# Allegro board XS6-2.brd
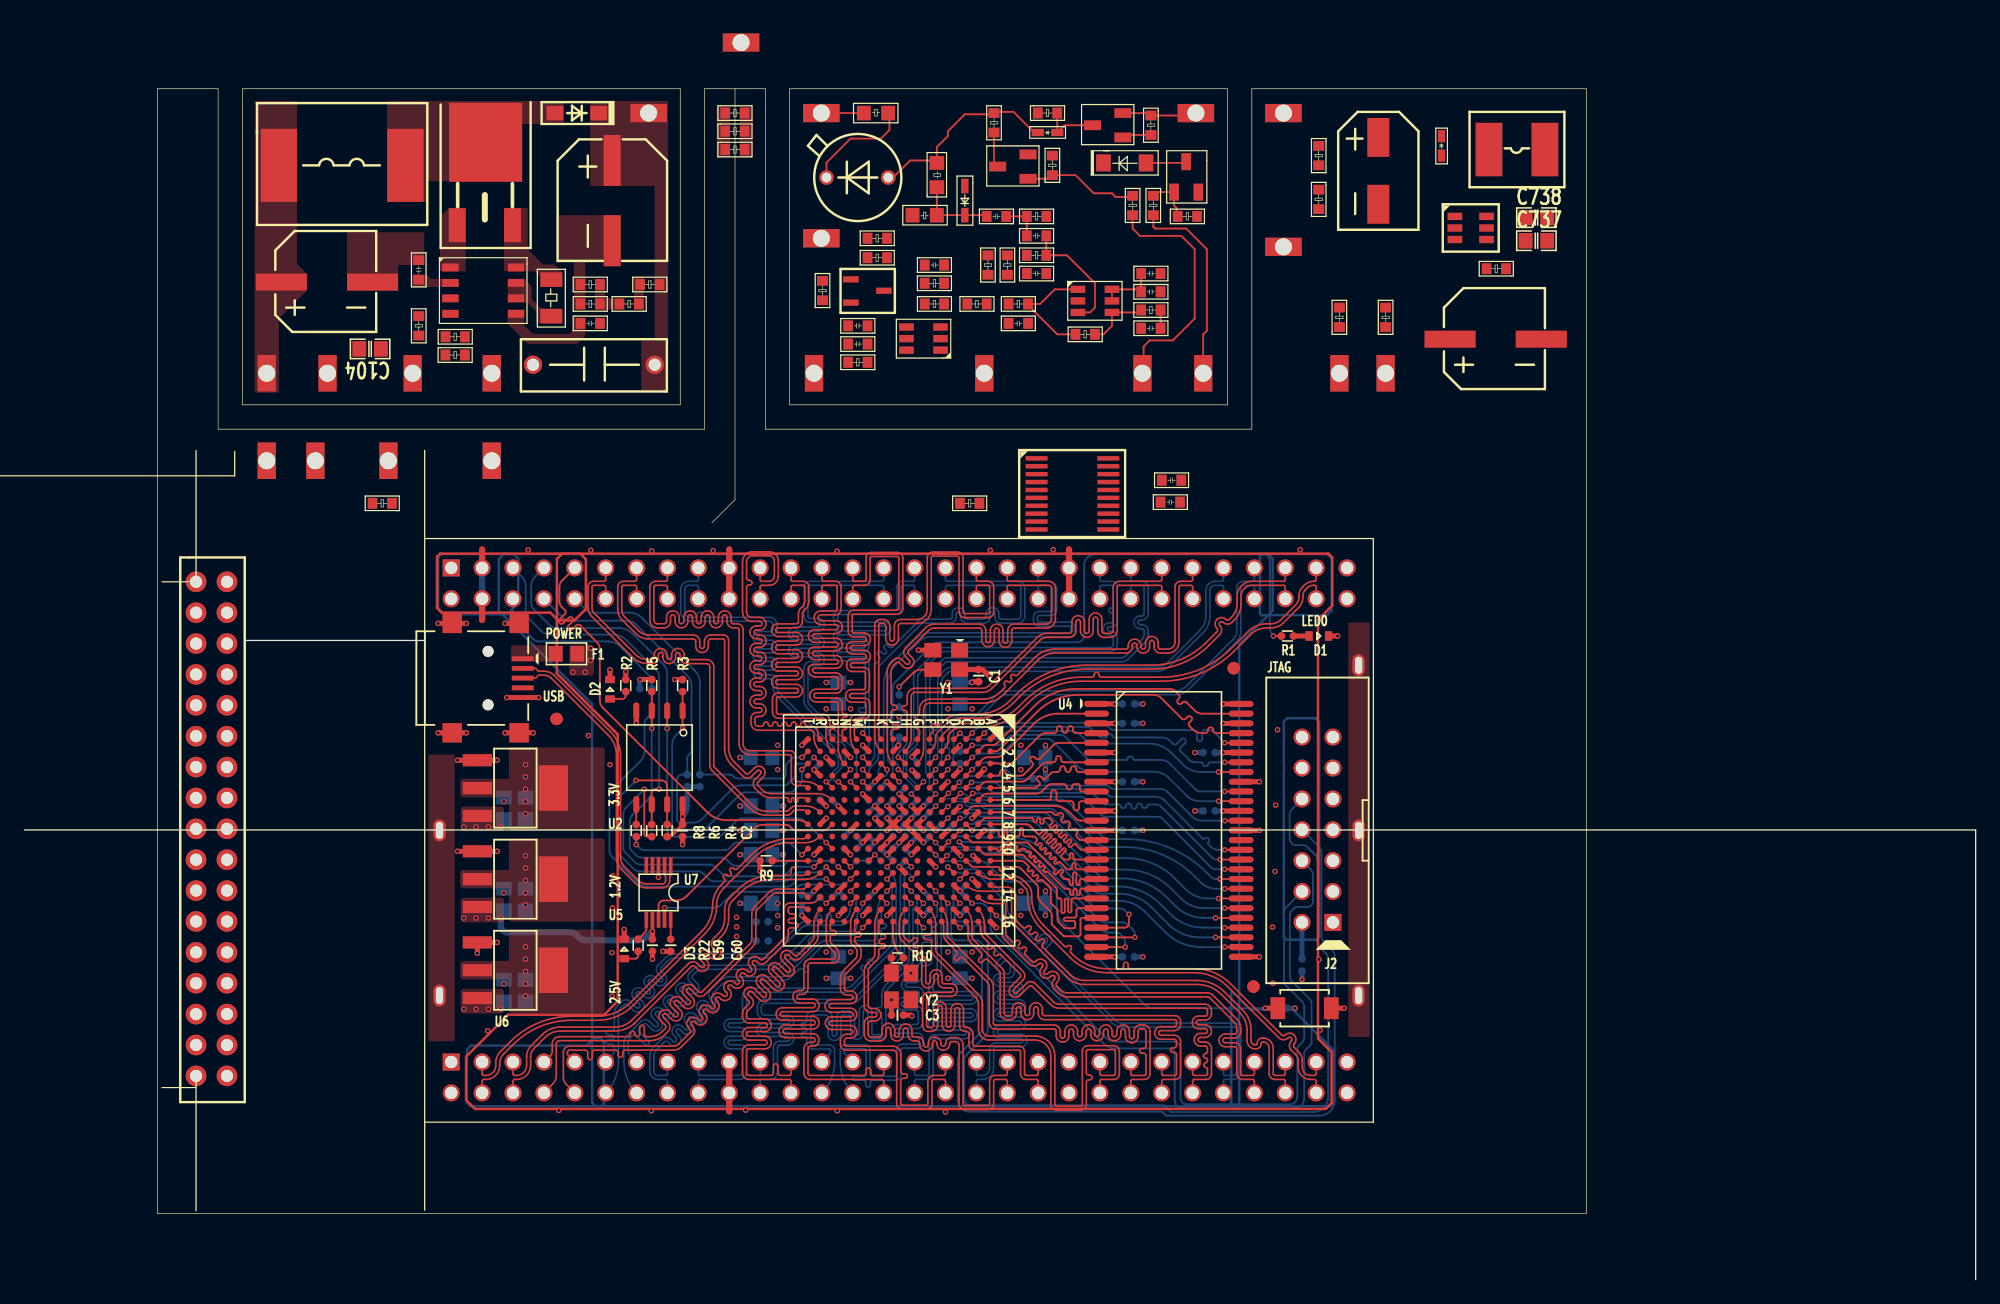
[diagram p0: board, top side]
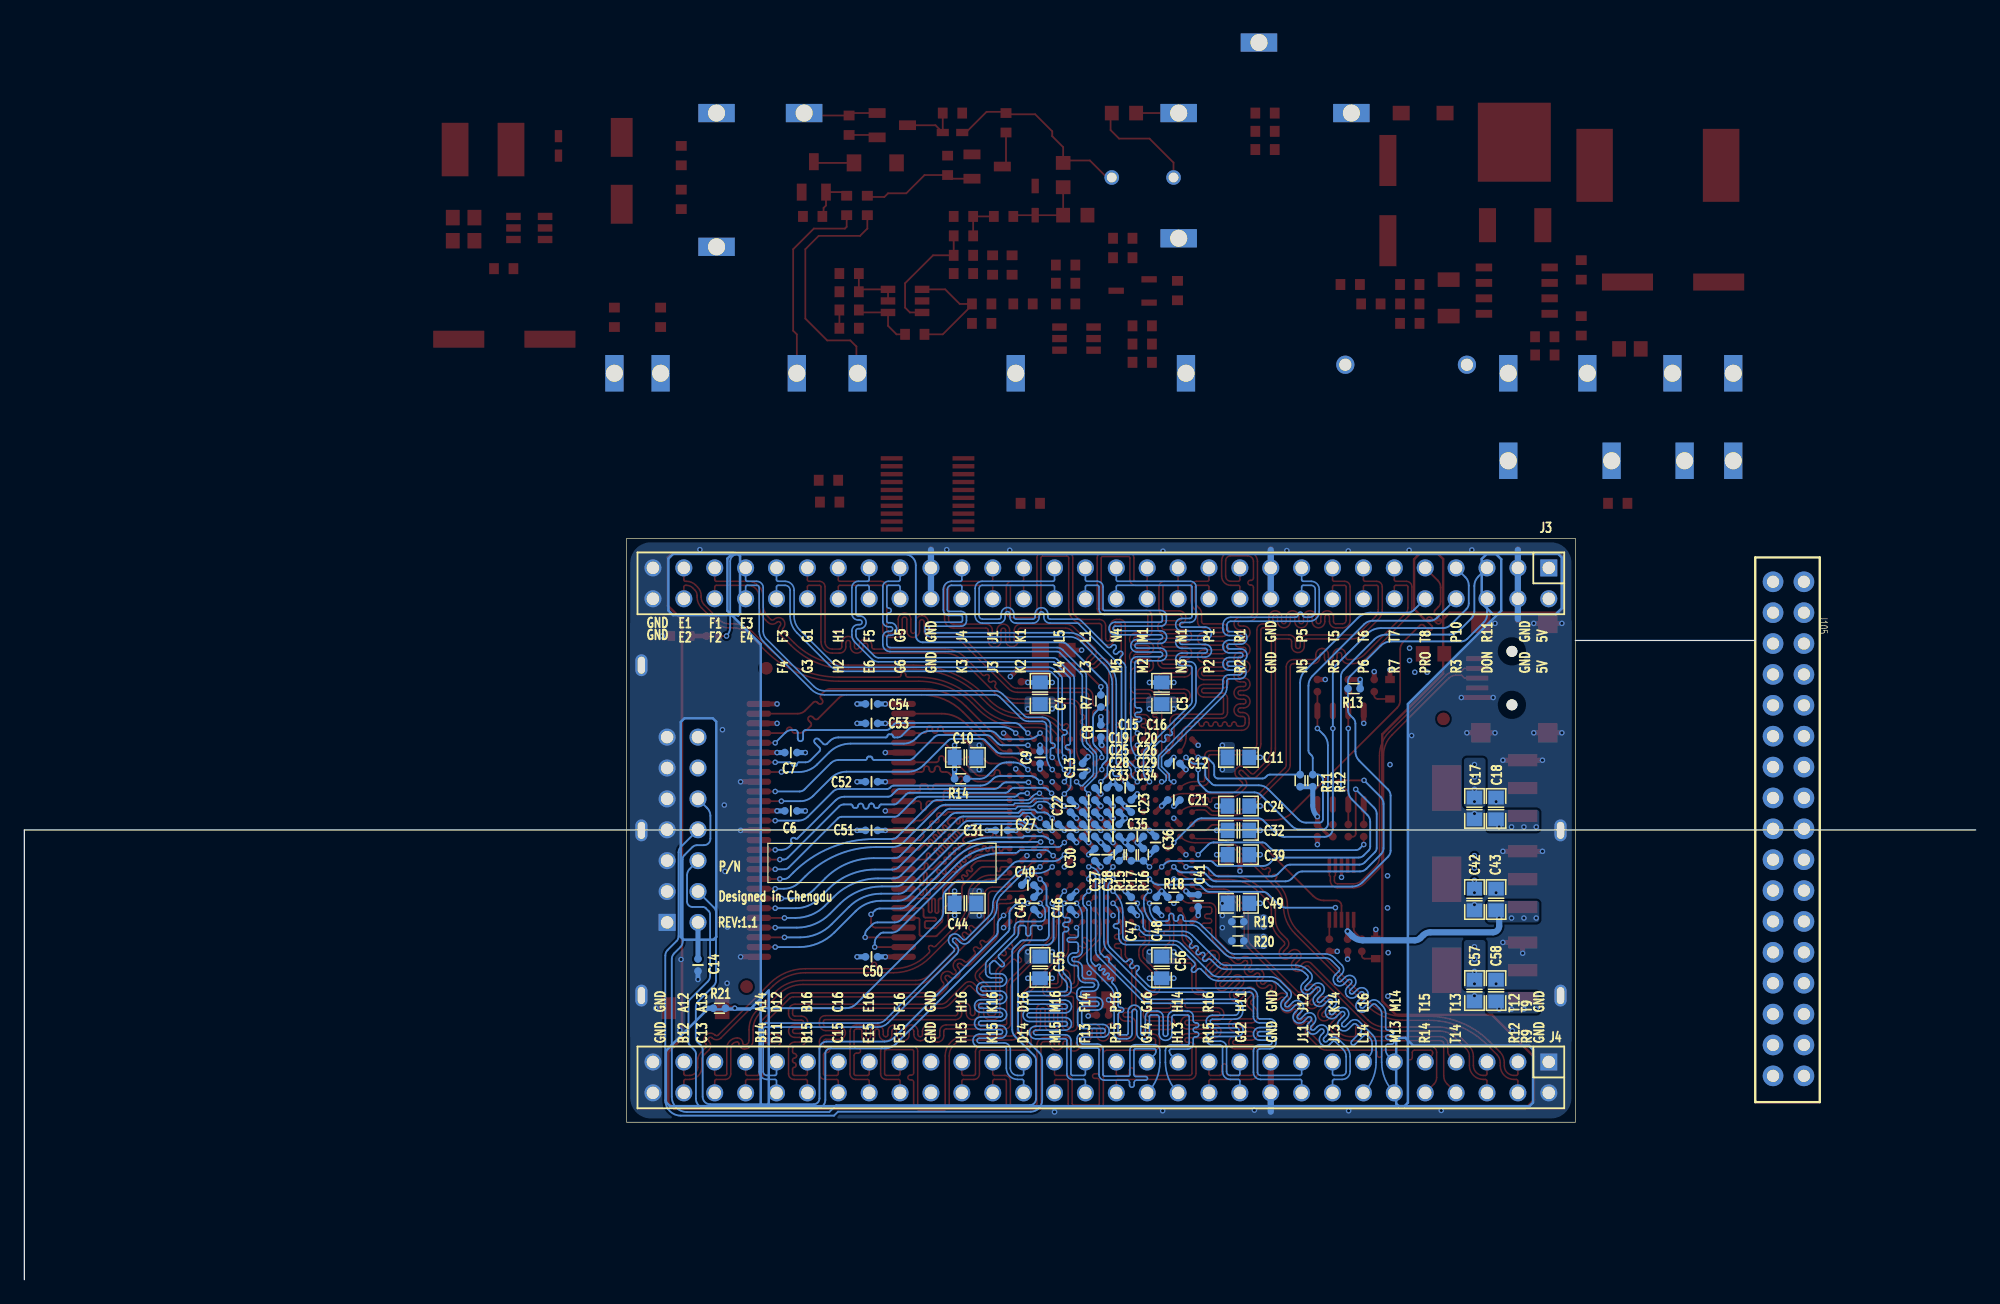
[diagram p1: board, bottom side, seen from below]

Outline 160.45 x 52.58 mm; copper layers: TOP, L2_GND, L3_P, BOTTOM. Coordinates in mm from the lower left corner of the outline.
Outline path: 0,36.99 160.45,36.99 160.45,0 ; 18.11,52.58 32.92,52.58

## Design rules (mm)
constraint set DEFAULT: min track width 0.147, pair gap 0.102
net group DP_USB: nets USB_DM USB_DP
net group NG_SDRAM_D8-15: nets SDRAM_DQ8 SDRAM_DQ9 SDRAM_DQ10 SDRAM_DQ11 SDRAM_DQ12 SDRAM_DQ13 SDRAM_DQ14 SDRAM_DQ15 SDRAM_UDQM

## Placement (name value [footprint] x y rotation side)
C1  100nF  [C0402]  78.47 49.68 270 top
C2  100nF  [C0402]  54.13 36.94 270 top
C3  100nF  [C0402]  71.8 21.76 0 top
C4  10uF  [C0805]  76.93 48.23 90 bottom
C5  10uF  [C0805]  66.93 48.23 90 bottom
C6  100nF  [C0402]  97.42 38.56 180 bottom
C7  100nF  [C0402]  97.42 43.36 180 bottom
C8  100nF  [C0402]  71.93 45.13 90 bottom
C9  100nF  [C0402]  76.93 42.96 270 bottom
C10  10uF  [C0805]  83.07 42.96 0 bottom
C11  10uF  [C0805]  60.62 42.96 180 bottom
C12  100nF  [C0402]  65.93 42.46 0 bottom
C13  100nF  [C0402]  73.43 41.96 90 bottom
C14  100nF  [C0402]  105.06 25.88 270 bottom
C15  100nF  [C0402]  71.93 40.46 180 bottom
C16  100nF  [C0402]  69.93 40.46 0 bottom
C17  22uF/6.3V  [C0805]  41.21 38.76 270 bottom
C18  10uF/10V  [C0805]  39.43 38.76 90 bottom
C19  100nF  [C0402]  72.93 39.46 180 bottom
C20  100nF  [C0402]  70.93 39.46 180 bottom
C21  100nF  [C0402]  65.93 39.46 180 bottom
C22  100nF  [C0402]  74.43 38.96 270 bottom
C23  100nF  [C0402]  69.43 38.96 270 bottom
C24  10uF  [C0805]  60.62 38.96 180 bottom
C25  100nF  [C0402]  72.93 38.46 180 bottom
C26  100nF  [C0402]  70.93 38.46 0 bottom
C27  100nF  [C0402]  75.93 37.46 0 bottom
C28  100nF  [C0402]  72.93 37.46 180 bottom
C29  100nF  [C0402]  70.93 37.46 0 bottom
C30  100nF  [C0402]  74.43 36.96 90 bottom
C31  100nF  [C0402]  80.11 36.96 0 bottom
C32  10uF  [C0805]  60.62 36.96 180 bottom
C33  100nF  [C0402]  72.93 36.46 180 bottom
C34  100nF  [C0402]  70.93 36.46 180 bottom
C35  100nF  [C0402]  68.93 36.46 0 bottom
C36  100nF  [C0402]  67.43 35.96 90 bottom
C37  100nF  [C0402]  72.43 34.96 270 bottom
C38  100nF  [C0402]  71.43 34.96 90 bottom
C39  10uF  [C0805]  60.62 34.96 180 bottom
C40  100nF  [C0402]  77.93 32.46 180 bottom
C41  100nF  [C0402]  63.93 31.17 270 bottom
C42  22uF/6.3V  [C0805]  41.21 31.27 270 bottom
C43  10uF/10V  [C0805]  39.43 31.27 90 bottom
C44  10uF  [C0805]  83.07 30.96 0 bottom
C45  100nF  [C0402]  77.43 30.96 90 bottom
C46  100nF  [C0402]  74.43 30.96 270 bottom
C47  100nF  [C0402]  69.43 30.96 270 bottom
C48  100nF  [C0402]  67.38 30.96 90 bottom
C49  10uF  [C0805]  60.62 30.96 180 bottom
C50  100nF  [C0402]  90.79 26.56 0 bottom
C51  100nF  [C0402]  90.79 36.96 0 bottom
C52  100nF  [C0402]  90.79 40.96 0 bottom
C53  100nF  [C0402]  90.79 45.76 0 bottom
C54  100nF  [C0402]  90.79 47.36 0 bottom
C55  10uF  [C0805]  76.93 25.68 270 bottom
C56  10uF  [C0805]  66.94 25.68 270 bottom
C57  22uF/6.3V  [C0805]  41.21 23.78 270 bottom
C58  10uF/10V  [C0805]  39.43 23.78 90 bottom
C59  100nF  [C0402]  51.65 27.5 270 top
C60  100nF  [C0402]  53.15 27.5 270 top
C102  0.1uF/35V  [C0603]  32.43 82.26 90 top
C103  220uF/35V  [CAP-SMD-D8D0-L8D3-W8D3-P7D5]  21.13 82.06 0 top
C104  10uF/35V  [C0805]  28.43 76.56 180 top
C205  0.1uF/35V  [C0603]  45.73 78.66 0 top
C401  4.7uF/400V  [CAP-SMD-D8D0-L10D3-B8D3]  48.33 92.06 270 top
C602  0.1uF/400V  [CAP-THR-L11D4-W3D8-P10D0-D0D8]  51.83 75.26 180 top
C639  0.1uF/16V  [C0603]  93.53 65.76 0 top
C640  0.1uF/16V  [C0603]  93.43 63.96 0 top
C715  100uF/35V  [CAP-SMD-L6D6-W6D6-P5D5-MM]  111.33 93.96 270 top
C737  10uF/35V  [C0805]  124.33 85.46 0 top
C738  10uF/35V  [C0805]  124.33 87.36 0 top
C739  220uF/35V  [CAP-SMD-D8D0-L8D3-W8D3-P7D5]  117.23 77.36 0 top
C930  0.1uF/16V  [C0603]  80.73 87.46 180 top
C934  10uF/16V  [C0603]  69.33 78.46 180 top
C935  0.1uF/16V  [C0603]  69.33 76.96 180 top
C936  0.1uF/16V  [C0603]  74.03 83.46 0 top
C941  10uF/16V  [C0603]  91.83 82.76 0 top
C942  0.1uF/16V  [C0603]  91.83 81.26 0 top
C943  0.1uF/16V  [C0603]  84.03 85.86 180 top
C944  0.1uF/16V  [C0603]  82.43 82.76 0 top
C945  0.1uF/16V  [C0603]  93.43 78.26 180 top
C946  0.1uF/16V  [C0603]  80.93 78.66 0 top
D1  GREEN  [Q0603]  106.44 52.94 0 top
D2  GREEN  [Q0603]  48.16 48.57 90 top
D3  GREEN  [Q0603]  49.33 27.2 90 top
D77  BAS521-7  [SOD-523-L1D2-W0D8-P1D6-MM]  116.53 94.06 270 top
D92  PTVSLC3D3V3B  [SOD323-L1D8-W1D3-P2D4-MM]  77.33 89.96 270 top
D94  SAPD  [SAPD-THR-2P]  68.53 90.66 180 top
D201  E1G  [SOD-123FL]  47.23 95.96 180 top
D611  MMSZ12T1G  [SOD-123-L2D8-W1D8-P3D5-MM]  88.73 91.86 0 top
D812  BAS521-7  [SOD-523-L1D2-W0D8-P1D6-MM]  83.33 94.36 0 top
F1  400mA  [F0805]  44.58 51.48 0 top
J1  MINI USB  [MINIUSB-AB-SM]  32.23 49.48 270 top
J2  CONN RCPT 7x2  [DIP2X7_2P54]  107.6 29.39 90 top
J3  CONN PLUG 30x2  [DIP2X30_2P54]  35.1 58.55 0 bottom
J4  CONN PLUG 30x2  [DIP2X30_2P54]  35.1 17.91 0 bottom
J105  Header-17x2  [DIP-17X2-2D54MM]  14.12 57.4 270 bottom
L74  47uH/1A  [IND-SMD-L5D0-W5D0-P4D6-MM]  125.03 92.96 180 top
L101  100uH/2A  [IND-SMD-L11D5-W10D0-P10D4]  20.93 91.66 0 top
NOREF  -  []  43.63 95.96 0 top
NOREF#2  -  [unnamed#2]  43.76 46.13 0 top
NOREF#3  -  []  108.76 17.91 90 top
NOREF#4  -  []  117.23 77.36 0 top
NOREF#5  -  []  35.59 86.74 0 top
NOREF#6  -  []  71.92 12.95 90 top
NOREF#7  -  []  17.93 97.96 0 top
NOREF#8  -  []  100.93 97.96 0 top
NOREF#9  -  []  43.33 78.36 90 top
NOREF#10  -  []  46.63 90.36 0 top
NOREF#11  -  []  21.13 82.06 0 top
NOREF#12  -  []  10.93 5.46 90 top
NOREF#13  -  []  10.93 67.96 90 top
NOREF#14  -  []  10.93 5.46 0 top
NOREF#15  -  []  122.33 73.26 90 top
NOREF#16  -  []  43.33 79.26 90 top
NOREF#17  -  []  26.23 77.96 90 top
NOREF#18  -  []  35.59 86.74 0 top
NOREF#19  -  []  20.63 80.21 0 top
NOREF#20  -  []  44.48 80.63 90 top
NOREF#21  -  []  51.73 87.56 90 top
NOREF#22  -  []  48.33 85.46 90 top
NOREF#23  -  [unnamed#2]  101.07 24.1 0 top
NOREF#24  -  [unnamed#2]  99.44 50.29 0 top
NOREF#25  -  []  116.73 75.51 0 top
NOREF#26  -  []  163.29 66.22 180 bottom
Q45  FH3400C  [SOT-23-3-L2D9-W1D3-P1D9-MM]  96.53 89.46 270 top
Q83  FH3400C  [SOT-23-3-L2D9-W1D3-P1D9-MM]  82.53 92.56 0 top
Q89  AO3401A  [SOT-23-3-L2D9-W1D3-P1D9-MM]  90.33 95.96 0 top
Q201  AOD458  [TO-252-2-DPAK]  37.93 93.56 90 top
R1  1K  [R0402]  103.86 52.94 180 top
R2  680R  [R0402]  49.46 48.87 270 top
R3  2.4K  [R0402]  54.13 48.87 90 top
R4  4.7K  [R0402]  52.86 36.94 270 top
R5  4.7K  [R0402]  51.59 48.87 90 top
R6  33R  [R0402]  51.59 36.94 90 top
R7  33R  [R0402]  71.93 47.6 90 bottom
R8  33R  [R0402]  50.32 36.94 90 top
R9  1K  [R0402]  61 34.46 180 top
R10  33R  [R0402]  71.8 26.47 180 top
R11  4.7K  [R0402]  55.55 41.05 270 bottom
R12  4.7K  [R0402]  54.51 41.05 270 bottom
R13  330R  [R0402]  51.11 48.62 180 bottom
R14  100R  [R0402]  83.46 41.2 0 bottom
R15  4.7K  [R0402]  70.43 34.96 90 bottom
R16  1K/NC  [R0402]  68.43 34.96 90 bottom
R17  1K  [R0402]  69.43 34.96 270 bottom
R18  4.7K  [R0402]  65.93 31.46 180 bottom
R19  0R/NC  [R0402]  60.67 29.44 180 bottom
R20  0R  [R0402]  60.67 27.86 180 bottom
R21  1K  [R0402]  103.3 22.33 180 bottom
R22  680R  [R0402]  50.47 27.5 270 top
R105  50mR  [R1206]  43.33 82.26 270 top
R172  0  [R0603]  57.63 95.96 0 top
R204  0  [R0603]  50.53 80.26 180 top
R206  DNP  [R0603]  32.43 77.66 90 top
R207  0  [R0603]  34.63 77.56 0 top
R209  DNP  [R0603]  34.63 76.06 0 top
R264  0  [R0603]  76.93 63.86 0 top
R302  DNP  [R0603]  47.33 81.86 180 top
R303  10K  [R0603]  47.33 80.26 180 top
R305  1.5M  [R0603]  52.23 81.86 180 top
R306  0  [R0603]  30.23 63.86 180 top
R326  1K  [R0603]  94.83 87.46 0 top
R528  100  [R0603]  92.83 87.56 90 top
R733  182K  [R0603]  106.43 93.26 270 top
R735  10K  [R0603]  106.43 89.66 270 top
R736  0  [R0603]  108.13 78.36 90 top
R740  10K  [R0603]  121.83 83.16 180 top
R741  0  [R0603]  111.93 78.36 90 top
R812  0  [R0603]  79.73 94.36 90 top
R818  1M  [R0603]  83.33 95.96 0 top
R822  1K  [R0603]  92.63 95.76 270 top
R842  100  [R0603]  91.13 87.56 90 top
R843  1K  [R0603]  84.53 90.86 90 top
R910  682  [R0603]  70.93 85.66 180 top
R911  332K  [R0805]  75.03 89.86 90 top
R916  10K  [R0603]  69.33 75.46 180 top
R941  100K  [R0805]  73.03 87.56 0 top
R956  100K  [R0603]  82.43 87.46 0 top
R957  4.99K  [R0603]  69.33 84.06 0 top
R960  499  [R0603]  65.63 80.56 90 top
R961  0  [R0603]  77.53 80.26 0 top
R962  10K  [R0603]  74.03 80.26 0 top
R963  1K  [R0603]  75.63 81.96 180 top
R965  4.99K  [R0603]  79.23 84.26 270 top
R966  4.99K  [R0603]  80.83 82.66 90 top
R967  100K  [R0603]  84.03 84.26 180 top
R968  4.99K  [R0603]  86.43 77.76 0 top
R969  100K  [R0603]  93.43 79.76 180 top
R970  100K  [R0603]  82.53 80.26 180 top
R971  0  [R0805]  71.03 95.96 180 top
R972  0  [R0603]  57.63 94.46 0 top
R973  0  [R0603]  57.63 92.96 0 top
S1  FSMRA2JH  [SMD_3X4X2MM]  105.27 22.33 0 top
T1  TPAD_015  [TP_OBL1_4X0_6]  109.71 50.54 90 top
T2  TPAD_015  [TP_OBL1_4X0_6]  34.14 36.96 90 top
T3  TPAD_015  [TP_OBL1_4X0_6]  109.71 36.96 90 top
T4  TPAD_015  [TP_OBL1_4X0_6]  34.14 23.37 90 top
T5  TPAD_015  [TP_OBL1_4X0_6]  109.71 23.37 90 top
TP1  T POINT F  [STAMP_HOLE_1D5X3D0_1D4]  58.93 101.76 90 bottom
TP2  T POINT F  [STAMP_HOLE_1D5X3D0_1D4]  51.33 95.96 270 top
TP3  T POINT F  [STAMP_HOLE_1D5X3D0_1D4]  19.93 74.56 180 top
TP4  T POINT F  [STAMP_HOLE_1D5X3D0_1D4]  24.93 74.56 180 top
TP5  T POINT F  [STAMP_HOLE_1D5X3D0_1D4]  31.93 74.56 180 top
TP6  T POINT F  [STAMP_HOLE_1D5X3D0_1D4]  38.43 74.56 180 top
TP7  T POINT F  [STAMP_HOLE_1D5X3D0_1D4]  19.93 67.36 0 top
TP8  T POINT F  [STAMP_HOLE_1D5X3D0_1D4]  29.93 67.36 0 top
TP9  T POINT F  [STAMP_HOLE_1D5X3D0_1D4]  38.43 67.36 0 top
TP10  T POINT F  [STAMP_HOLE_1D5X3D0_1D4]  23.93 67.36 0 top
TP11  T POINT F  [STAMP_HOLE_1D5X3D0_1D4]  65.53 95.96 90 top
TP12  T POINT F  [STAMP_HOLE_1D5X3D0_1D4]  65.53 85.66 90 top
TP16  QUENCH  [STAMP_HOLE_1D5X3D0_1D4]  96.93 74.56 180 top
TP25  RESET  [STAMP_HOLE_1D5X3D0_1D4]  91.93 74.56 180 top
TP32  T POINT F  [STAMP_HOLE_1D5X3D0_1D4]  111.93 74.56 180 top
TP33  T POINT F  [STAMP_HOLE_1D5X3D0_1D4]  108.13 74.56 180 top
TP34  T POINT F  [STAMP_HOLE_1D5X3D0_1D4]  103.53 84.96 90 top
TP35  T POINT F  [STAMP_HOLE_1D5X3D0_1D4]  103.53 95.96 90 top
TP37  T POINT F  [STAMP_HOLE_1D5X3D0_1D4]  78.93 74.56 180 top
TP38  PULSE  [STAMP_HOLE_1D5X3D0_1D4]  64.93 74.56 180 top
TP39  T POINT F  [STAMP_HOLE_1D5X3D0_1D4]  96.33 95.96 270 top
U1  W25Q16FVSIG  [SOIC8_1P27_208MIL]  52.22 42.94 270 top
U2  AMS1117-3.3  [SOT-223]  40.37 40.44 270 top
U3  xc6slx25ftg256  [FTG256]  71.93 36.96 270 top
U4  W9812G6KH-6  [TSOP54-400]  88.16 47.36 270 top
U5  AMS1117-1.2  [SOT-223]  40.37 32.94 270 top
U6  AMS1117-2.5  [SOT-223]  40.37 25.45 270 top
U7  CH340E  [MSOP10]  52.15 31.85 270 top
U69  TXS0108EPW  [TSSOP-20-L6D5-W4D4-PD0D65-CD6D5-MM]  83.23 67.56 0 top
U75  MAX5026EUT-T  [SOT23-6]  118.93 86.56 270 top
U92  TLV3501AIDBVR  [SOT-23-6-L2D9-W1D6-PD0D95-CD2D8-MM]  75.33 76.46 180 top
U98  TL431  [SOT-23-3-TL431]  67.53 82.76 270 top
U101  MAX1771ESA+  [SO-8]  40.43 83.26 270 top
U910  OPA357AIDBVR  [SOT-23-6-L2D9-W1D6-PD0D95-CD2D8-MM]  86.63 81.46 0 top
Y1  50MHz  [OSC3225]  75.8 50.98 180 top
Y2  TBD  [OSC3225]  72.1 24.12 90 top

## Library data of the parts
C1 C3 = CAP_0: room: PHY&FPGA
C2 C4-C60 = CAP_NP
C102 C104 C205 C639 C640 C737 C738 C930 C934-C936 C941-C946 = CAP NP
C103 C401 C602 C715 C739 = C
D1-D3 = LED: room: POWER
D77 D94 D201 D812 = DIODE
D92 = DIODE SCHOTTKY
D611 = DIODE ZENER
F1 = FUSE
J1 = USB_MINI_AB_RECEPTACLE: Tolerance: #TOL; User Part Number: HAMP
J2 = CONN RCPT 7x2/SM_1
J3 J4 = CONN PLUG 30x2
J105 = Header-17x2
L74 L101 = INDUCTOR
Q45 Q83 = FH3400C
Q89 = BSP316P_0
Q201 = IRF644PbF
R1-R22 = SMALL R1
R105 R172 R204 R206 R207 R209 R264 R302 R303 R305 R306 R326 R528 R733 R735 R736 R740 R741 R812 R818 R822 R842 R843 R910 R911 R916 R941 R956 R957 R960-R963 R965-R973 = R
S1 = SWITCH_2: User Part Number: partnum; Tolerance: RichardLC; room: CPU
T1-T5 = TESTLOOP
TP1-TP12 TP16 TP25 TP32-TP35 TP37-TP39 = T POINT F
U1 = EPCS1SI8N_0
U2 U5 U6 = AMS1117
U3 = xc6slx25ftg256
U4 = K4S561632C-TC75_0
U7 = CH340E
U69 = TXS0108EPW
U75 = MAX5026EUT-T
U92 = TLV3501AIDBVR
U98 = TL431/TI
U101 = MAX1771ESA+
U910 = OPA357AIDBVR
Y1 Y2 = OSCILLATOR_0: room: PHY&FPGA

## Footprints (pads in the part's own frame, mm; a bottom-side part is the same pattern mirrored in y, then rotated)
C0402
  round 0.635 smd: 1(-0.5,0) 2(0.5,0)
C0603
  rect 0.8x0.9 smd: 1(0,0) 2(1.6,0)
C0805
  rect 1.141x1.27 smd: 1(-0.889,0) 2(0.889,0)
CAP-SMD-D8D0-L8D3-W8D3-P7D5
  rect 4.2x1.4 smd: 1(0,0) 2(7.5,0)
CAP-SMD-D8D0-L10D3-B8D3
  rect 4.2x1.4 smd: 1(0,0) 2(6.6,0)
CAP-SMD-L6D6-W6D6-P5D5-MM
  rect 3.2x1.8 smd: 1(0,0) 2(5.5,0)
CAP-THR-L11D4-W3D8-P10D0-D0D8
  round 1.5 hole 1: 1(0,0) 2(10,0)
DIP2X7_2P54
  rect 1.399x1.399 hole 1.021: 1(0,0)
  round 1.399 hole 1.021: 2(0,2.54) 3(2.54,0) 4(2.54,2.54) 5(5.08,0) 6(5.08,2.54) 7(7.62,0) 8(7.62,2.54) 9(10.16,0) 10(10.16,2.54) 11(12.7,0) 12(12.7,2.54) 13(15.24,0) 14(15.24,2.54)
DIP2X30_2P54
  rect 1.399x1.399 hole 1.021: 1(0,0)
  round 1.399 hole 1.021: 2(0,2.54) 3(2.54,0) 4(2.54,2.54) 5(5.08,0) 6(5.08,2.54) 7(7.62,0) 8(7.62,2.54) 9(10.16,0) 10(10.16,2.54) 11(12.7,0) 12(12.7,2.54) 13(15.24,0) 14(15.24,2.54) 15(17.78,0) 16(17.78,2.54) 17(20.32,0) 18(20.32,2.54) 19(22.86,0) 20(22.86,2.54) 21(25.4,0) 22(25.4,2.54) 23(27.94,0) 24(27.94,2.54) 25(30.48,0) 26(30.48,2.54) 27(33.02,0) 28(33.02,2.54) 29(35.56,0) 30(35.56,2.54) 31(38.1,0) 32(38.1,2.54) 33(40.64,0) 34(40.64,2.54) 35(43.18,0) 36(43.18,2.54) 37(45.72,0) 38(45.72,2.54) 39(48.26,0) 40(48.26,2.54) 41(50.8,0) 42(50.8,2.54) 43(53.34,0) 44(53.34,2.54) 45(55.88,0) 46(55.88,2.54) 47(58.42,0) 48(58.42,2.54) 49(60.96,0) 50(60.96,2.54) 51(63.5,0) 52(63.5,2.54) 53(66.04,0) 54(66.04,2.54) 55(68.58,0) 56(68.58,2.54) 57(71.12,0) 58(71.12,2.54) 59(73.66,0) 60(73.66,2.54)
DIP-17X2-2D54MM
  round 1.7 hole 1: 1(0,-2.54) 2(0,0) 3(2.54,-2.54) 4(2.54,0) 5(5.08,-2.54) 6(5.08,0) 7(7.62,-2.54) 8(7.62,0) 9(10.16,-2.54) 10(10.16,0) 11(12.7,-2.54) 12(12.7,0) 13(15.24,-2.54) 14(15.24,0) 15(17.78,-2.54) 16(17.78,0) 17(20.32,-2.54) 18(20.32,0) 19(22.86,-2.54) 20(22.86,0) 21(25.4,-2.54) 22(25.4,0) 23(27.94,-2.54) 24(27.94,0) 25(30.48,-2.54) 26(30.48,0) 27(33.02,-2.54) 28(33.02,0) 29(35.56,-2.54) 30(35.56,0) 31(38.1,-2.54) 32(38.1,0) 33(40.64,-2.54) 34(40.64,0)
F0805
  rect 1.141x1.27 smd: 1(-0.889,0) 2(0.889,0)
FTG256
  round 0.483 smd: A1(-7.5,7.5) A2(-6.5,7.5) A3(-5.5,7.5) A4(-4.5,7.5) A5(-3.5,7.5) A6(-2.5,7.5) A7(-1.5,7.5) A8(-0.5,7.5) A9(0.5,7.5) A10(1.5,7.5) A11(2.5,7.5) A12(3.5,7.5) A13(4.5,7.5) A14(5.5,7.5) A15(6.5,7.5) A16(7.5,7.5) B1(-7.5,6.5) B2(-6.5,6.5) B3(-5.5,6.5) B4(-4.5,6.5) B5(-3.5,6.5) B6(-2.5,6.5) B7(-1.5,6.5) B8(-0.5,6.5) B9(0.5,6.5) B10(1.5,6.5) B11(2.5,6.5) B12(3.5,6.5) B13(4.5,6.5) B14(5.5,6.5) B15(6.5,6.5) B16(7.5,6.5) C1(-7.5,5.5) C2(-6.5,5.5) C3(-5.5,5.5) C4(-4.5,5.5) C5(-3.5,5.5) C6(-2.5,5.5) C7(-1.5,5.5) C8(-0.5,5.5) C9(0.5,5.5) C10(1.5,5.5) C11(2.5,5.5) C12(3.5,5.5) C13(4.5,5.5) C14(5.5,5.5) C15(6.5,5.5) C16(7.5,5.5) D1(-7.5,4.5) D2(-6.5,4.5) D3(-5.5,4.5) D4(-4.5,4.5) D5(-3.5,4.5) D6(-2.5,4.5) D7(-1.5,4.5) D8(-0.5,4.5) D9(0.5,4.5) D10(1.5,4.5) D11(2.5,4.5) D12(3.5,4.5) D13(4.5,4.5) D14(5.5,4.5) D15(6.5,4.5) D16(7.5,4.5) E1(-7.5,3.5) E2(-6.5,3.5) E3(-5.5,3.5) E4(-4.5,3.5) E5(-3.5,3.5) E6(-2.5,3.5) E7(-1.5,3.5) E8(-0.5,3.5) E9(0.5,3.5) E10(1.5,3.5) E11(2.5,3.5) E12(3.5,3.5) E13(4.5,3.5) E14(5.5,3.5) E15(6.5,3.5) E16(7.5,3.5) F1(-7.5,2.5) F2(-6.5,2.5) F3(-5.5,2.5) F4(-4.5,2.5) F5(-3.5,2.5) F6(-2.5,2.5) F7(-1.5,2.5) F8(-0.5,2.5) F9(0.5,2.5) F10(1.5,2.5) F11(2.5,2.5) F12(3.5,2.5) F13(4.5,2.5) F14(5.5,2.5) F15(6.5,2.5) F16(7.5,2.5) G1(-7.5,1.5) G2(-6.5,1.5) G3(-5.5,1.5) G4(-4.5,1.5) G5(-3.5,1.5) G6(-2.5,1.5) G7(-1.5,1.5) G8(-0.5,1.5) G9(0.5,1.5) G10(1.5,1.5) G11(2.5,1.5) G12(3.5,1.5) G13(4.5,1.5) G14(5.5,1.5) G15(6.5,1.5) G16(7.5,1.5) H1(-7.5,0.5) H2(-6.5,0.5) H3(-5.5,0.5) H4(-4.5,0.5) H5(-3.5,0.5) H6(-2.5,0.5) H7(-1.5,0.5) H8(-0.5,0.5) H9(0.5,0.5) H10(1.5,0.5) H11(2.5,0.5) H12(3.5,0.5) H13(4.5,0.5) H14(5.5,0.5) H15(6.5,0.5) H16(7.5,0.5) J1(-7.5,-0.5) J2(-6.5,-0.5) J3(-5.5,-0.5) J4(-4.5,-0.5) J5(-3.5,-0.5) J6(-2.5,-0.5) J7(-1.5,-0.5) J8(-0.5,-0.5) J9(0.5,-0.5) J10(1.5,-0.5) J11(2.5,-0.5) J12(3.5,-0.5) J13(4.5,-0.5) J14(5.5,-0.5) J15(6.5,-0.5) J16(7.5,-0.5) K1(-7.5,-1.5) K2(-6.5,-1.5) K3(-5.5,-1.5) K4(-4.5,-1.5) K5(-3.5,-1.5) K6(-2.5,-1.5) K7(-1.5,-1.5) K8(-0.5,-1.5) K9(0.5,-1.5) K10(1.5,-1.5) K11(2.5,-1.5) K12(3.5,-1.5) K13(4.5,-1.5) K14(5.5,-1.5) K15(6.5,-1.5) K16(7.5,-1.5) L1(-7.5,-2.5) L2(-6.5,-2.5) L3(-5.5,-2.5) L4(-4.5,-2.5) L5(-3.5,-2.5) L6(-2.5,-2.5) L7(-1.5,-2.5) L8(-0.5,-2.5) L9(0.5,-2.5) L10(1.5,-2.5) L11(2.5,-2.5) L12(3.5,-2.5) L13(4.5,-2.5) L14(5.5,-2.5) L15(6.5,-2.5) L16(7.5,-2.5) M1(-7.5,-3.5) M2(-6.5,-3.5) M3(-5.5,-3.5) M4(-4.5,-3.5) M5(-3.5,-3.5) M6(-2.5,-3.5) M7(-1.5,-3.5) M8(-0.5,-3.5) M9(0.5,-3.5) M10(1.5,-3.5) M11(2.5,-3.5) M12(3.5,-3.5) M13(4.5,-3.5) M14(5.5,-3.5) M15(6.5,-3.5) M16(7.5,-3.5) N1(-7.5,-4.5) N2(-6.5,-4.5) N3(-5.5,-4.5) N4(-4.5,-4.5) N5(-3.5,-4.5) N6(-2.5,-4.5) N7(-1.5,-4.5) N8(-0.5,-4.5) N9(0.5,-4.5) N10(1.5,-4.5) N11(2.5,-4.5) N12(3.5,-4.5) N13(4.5,-4.5) N14(5.5,-4.5) N15(6.5,-4.5) N16(7.5,-4.5) P1(-7.5,-5.5) P2(-6.5,-5.5) P3(-5.5,-5.5) P4(-4.5,-5.5) P5(-3.5,-5.5) P6(-2.5,-5.5) P7(-1.5,-5.5) P8(-0.5,-5.5) P9(0.5,-5.5) P10(1.5,-5.5) P11(2.5,-5.5) P12(3.5,-5.5) P13(4.5,-5.5) P14(5.5,-5.5) P15(6.5,-5.5) P16(7.5,-5.5) R1(-7.5,-6.5) R2(-6.5,-6.5) R3(-5.5,-6.5) R4(-4.5,-6.5) R5(-3.5,-6.5) R6(-2.5,-6.5) R7(-1.5,-6.5) R8(-0.5,-6.5) R9(0.5,-6.5) R10(1.5,-6.5) R11(2.5,-6.5) R12(3.5,-6.5) R13(4.5,-6.5) R14(5.5,-6.5) R15(6.5,-6.5) R16(7.5,-6.5) T1(-7.5,-7.5) T2(-6.5,-7.5) T3(-5.5,-7.5) T4(-4.5,-7.5) T5(-3.5,-7.5) T6(-2.5,-7.5) T7(-1.5,-7.5) T8(-0.5,-7.5) T9(0.5,-7.5) T10(1.5,-7.5) T11(2.5,-7.5) T12(3.5,-7.5) T13(4.5,-7.5) T14(5.5,-7.5) T15(6.5,-7.5) T16(7.5,-7.5)
IND-SMD-L5D0-W5D0-P4D6-MM
  rect 2.2x4.4 smd: 1(0,0) 2(4.6,0)
IND-SMD-L11D5-W10D0-P10D4
  rect 3x6 smd: 1(0,0) 2(10.4,0)
MINIUSB-AB-SM
  round 0.9 hole 0.9 unplated: (-2.2,5.9) (2.2,5.9)
  rect 0.4x1.8 smd: 1(-1.6,8.75) 2(-0.8,8.75) 3(0,8.75) 4(0.8,8.75) 5(1.6,8.75)
  rect 1.6x1.6 smd: S1(-4.5,8.45) S2(4.5,8.45) S3(-4.5,2.95) S4(4.5,2.95)
MSOP10
  rect 1.3x0.3 smd: 1(-2.25,1) 2(-2.25,0.5) 3(-2.25,0) 4(-2.25,-0.5) 5(-2.25,-1) 6(2.25,-1) 7(2.25,-0.5) 8(2.25,0) 9(2.25,0.5) 10(2.25,1)
OSC3225
  rect 1.4x1.2 smd: 1(-1.1,-0.8) 2(1.1,-0.8) 3(1.1,0.8) 4(-1.1,0.8)
Q0603
  rect 0.6x0.8 smd: 1(-0.8,0) 2(0.8,0)
R0402
  round 0.635 smd: 1(-0.5,0) 2(0.5,0)
R0603
  rect 0.8x0.9 smd: 1(0,0) 2(1.6,0)
R0805
  rect 1.14x1.2 smd: 1(0,0) 2(2,0)
R1206
  rect 1.2x1.8 smd: 1(0,0) 2(3,0)
SAPD-THR-2P
  round 1.2 hole 0.8: 1(2.576,0) 2(-2.504,0)
SMD_3X4X2MM
  rect 1.2x1.8 smd: 1(-2.2,0) 2(2.2,0)
SO-8
  rect 0.65x1.35 smd: 1(0,-5.4) 2(1.27,-5.4) 3(2.54,-5.4) 4(3.81,-5.4) 5(3.81,0) 6(2.54,0) 7(1.27,0) 8(0,0)
SOD323-L1D8-W1D3-P2D4-MM
  rect 1.2x0.6 smd: 1(0,0) 2(2.4,0)
SOD-123-L2D8-W1D8-P3D5-MM
  rect 1.2x1.4 smd: 1(0,0) 2(3.5,0)
SOD-123FL
  rect 1.4x1.2 smd: 1(0,0) 2(3.6,0)
SOD-523-L1D2-W0D8-P1D6-MM
  rect 1x0.6 smd: 1(0,0) 2(1.6,0)
SOIC8_1P27_208MIL
  oval 1.4x0.5 smd: 1(-3.85,1.905) 2(-3.85,0.635) 3(-3.85,-0.635) 4(-3.85,-1.905) 5(3.85,-1.905) 6(3.85,-0.635) 7(3.85,0.635) 8(3.85,1.905)
SOT23-6
  rect 0.6x1.2 smd: 1(-0.9,-1.3) 2(0.05,-1.3) 3(1,-1.3) 4(1,1.3) 5(0.05,1.3) 6(-0.9,1.3)
SOT-23-3-L2D9-W1D3-P1D9-MM
  rect 1.4x0.8 smd: 1(0,-2) 2(0,0) 3(-2.5,-1)
SOT-23-3-TL431
  rect 0.51x1.27 smd: 1(0.476,0.434) 2(1.415,3.142) 3(2.391,0.434)
SOT-23-6-L2D9-W1D6-PD0D95-CD2D8-MM
  rect 1.2x0.6 smd: 1(0,0) 2(0,-0.95) 3(0,-1.9) 4(2.8,-1.9) 5(2.8,-0.95) 6(2.8,0)
SOT-223
  rect 1x2.4 smd: 1(-2.29,-3.125) 2(0,-3.125) 3(2.29,-3.125)
  rect 3.75x2.4 smd: 4(0,3.125)
STAMP_HOLE_1D5X3D0_1D4
  rect 1.5x3 hole 1.4: 1(0,0)
TO-252-2-DPAK
  rect 2.8x1.4 smd: 1(-6.82,2.34) 3(-6.82,-2.21)
  rect 6.5x6 smd: 2(0,0)
TP_OBL1_4X0_6
  oval 1.8x1 hole 1.4x0.6: 1(0,0)
TSOP54-400
  oval 0.508x2.032 smd: 1(0,0) 2(0.8,0) 3(1.6,0) 4(2.4,0) 5(3.2,0) 6(4,0) 7(4.8,0) 8(5.6,0) 9(6.4,0) 10(7.2,0) 11(8,0) 12(8.8,0) 13(9.6,0) 14(10.4,0) 15(11.2,0) 16(12,0) 17(12.8,0) 18(13.6,0) 19(14.4,0) 20(15.2,0) 21(16,0) 22(16.8,0) 23(17.6,0) 24(18.4,0) 25(19.2,0) 26(20,0) 27(20.8,0) 28(20.8,11.9) 29(20,11.9) 30(19.2,11.9) 31(18.4,11.9) 32(17.6,11.9) 33(16.8,11.9) 34(16,11.9) 35(15.2,11.9) 36(14.4,11.9) 37(13.6,11.9) 38(12.8,11.9) 39(12,11.9) 40(11.2,11.9) 41(10.4,11.9) 42(9.6,11.9) 43(8.8,11.9) 44(8,11.9) 45(7.2,11.9) 46(6.4,11.9) 47(5.6,11.9) 48(4.8,11.9) 49(4,11.9) 50(3.2,11.9) 51(2.4,11.9) 52(1.6,11.9) 53(0.8,11.9) 54(0,11.9)
TSSOP-20-L6D5-W4D4-PD0D65-CD6D5-MM
  rect 1.8x0.36 smd: 1(0,0) 2(0,-0.65) 3(0,-1.3) 4(0,-1.95) 5(0,-2.6) 6(0,-3.25) 7(0,-3.9) 8(0,-4.55) 9(0,-5.2) 10(0,-5.85) 11(5.9,-5.85) 12(5.9,-5.2) 13(5.9,-4.55) 14(5.9,-3.9) 15(5.9,-3.25) 16(5.9,-2.6) 17(5.9,-1.95) 18(5.9,-1.3) 19(5.9,-0.65) 20(5.9,0)
unnamed#2
  round 1.016 smd: (0,0) (0,0)

## Nets
5V_HVPS_IN: R306.2 TP7.1(TP)
+1.2V: C19.1 C20.1 C22.1 C24.1 C25.1 C26.1 C28.1 C29.1 C30.1 C32.1 C33.1 C34.1 C39.1 C42.1 U3.G7 U3.G9 U3.H8 U3.H10 U3.J7 U3.J9 U3.K8(VCCINT#K8) U3.K10 U5.2 U5.4(VOUT1)
+2.5V: C57.1 R19.2 U6.2 U6.4(VOUT1)
+3.3V: C1.1 C2.1 C4.1 C5.1 C6.1 C7.1 C8.1 C9.1 C10.1 C11.1 C12.1 C13.1 C14.1 C15.1 C16.1 C17.1 C21.1 C23.1 C27.1 C31.1 C35.1 C36.1 C37.1 C38.1 C40.1 C44.1 C50.1 C51.1 C52.1 C53.1 C54.1 J2.2(VREF) R3.2 R4.2 R5.2 R9.2 R11.2 R12.2 R13.2 R15.2 R16.2 R20.2 R21.1 U1.8 U2.2 U2.4(VOUT1) U3.B4 U3.B9 U3.B13 U3.D2 U3.D7 U3.D10 U3.E5 U3.F8 U3.F11 U3.G4 U3.G10 U3.H6 U3.J2 U3.J10 U3.K4 U3.L6 U3.L9 U3.N2 U3.N7 U3.N10 U3.R4 U3.R8 U4.1 U4.3 U4.9 U4.14 U4.27 U4.43 U4.49 Y1.4(VCC)
+5V: C18.1 C43.1 C58.1 C59.1 F1.2 J3.1 J3.2 R2.1 U2.3 U5.3 U6.3 U7.7(VCC)
GND: C1.2 C2.2 C3.2 C4.2 C5.2 C6.2 C7.2 C8.2 C9.2 C10.2 C11.2 C12.2 C13.2 C14.2 C15.2 C16.2 C17.2 C18.2 C19.2 C20.2 C21.2 C22.2 C23.2 C24.2 C25.2 C26.2 C27.2 C28.2 C29.2 C30.2 C31.2 C32.2 C33.2 C34.2 C35.2 C36.2 C37.2 C38.2 C39.2 C40.2 C41.2 C42.2 C43.2 C44.2 C45.2 C46.2 C47.2 C48.2 C49.2 C50.2 C51.2 C52.2 C53.2 C54.2 C55.2 C56.2 C57.2 C58.2 C59.2 C60.2 C102.2 C103.2 C104.2 C205.2 C401.2 C639.1 C640.2 D1.2(CATHODE) D2.2(CATHODE) D3.2(CATHODE) J1.5 J1.S1 J1.S2 J1.S3 J1.S4(SHLD4) J2.1 J2.3 J2.5 J2.7 J2.9 J2.11 J2.13 J3.3 J3.4 J3.19 J3.20 J3.41 J3.42 J3.59 J3.60 J4.1 J4.2 J4.19 J4.20 J4.41 J4.42 J4.59 J4.60 J105.22 J105.26 J105.27 R14.2 R17.1 R18.1 R105.2 R207.1 R302.2 R303.2 S1.2 T1.1(PIN1) T2.1(PIN1) T3.1(PIN1) T4.1(PIN1) T5.1(PIN1) TP1.1(TP) TP4.1(TP) TP10.1(TP) TP12.1(TP) U1.4 U2.1 U3.A1 U3.A16 U3.B7 U3.B11 U3.D4 U3.D13 U3.E9 U3.G2 U3.G8 U3.G15 U3.H7 U3.H9 U3.H12 U3.J5 U3.J8 U3.K7 U3.K9 U3.L2 U3.L15 U3.M8 U3.N13 U3.P3 U3.R6 U3.R10 U3.T1 U3.T16 U4.6 U4.12 U4.28 U4.41 U4.46 U4.52(VSSQ3) U4.54 U5.1 U6.1 U7.3 U69.11 U101.6 U101.7 Y1.2 Y2.2
GND_FIELD SIGNAL: C934.2 C935.2 C936.2 C941.2 C942.2 C944.2 C945.2 D92.1 Q45.2(S) Q83.2(S) R326.2 R818.1 R843.2 R910.2 R916.2 R941.1 R956.2 R966.1 R970.1 TP37.1(TP) U92.2(V-) U92.6 U98.2 U910.2(V-)
GND_QUENCH: C715.2 C737.2 C738.2 C739.2 R735.2 TP34.1(TP) U75.1 U75.2
VCC33: J105.24 J105.25
VCCIO: C3.1 C41.1 C45.1 C46.1 C47.1 C48.1 C49.1 C55.1 C56.1 R19.1 R20.1 U3.D15 U3.G13 U3.J15 U3.K13 U3.N15 U3.R13 Y2.4(VCC)
VDD5: C640.1 U69.19(VCCB)
VDD5_LCD: J105.28
VDD5X: C934.1 C935.1 C941.1 C942.1 R306.1 R960.1 R965.2 TP8.1(TP) U92.4 U910.5 U910.6
VDD33: C639.2 R264.1 U69.2
A12_L62N_0: J4.57 U3.A12
A13_L63N_0: J4.55 U3.A13
A14_L65N_0: J4.53 U3.A14
AUX_PWR_EN: R736.1 TP33.1(TP)
B12_L62P_0: J4.58 U3.B12
B14_L65P_0: J4.54 U3.B14
B15_L29P_1: J4.50 U3.B15
B16_L29N_1: J4.49 U3.B16
BL_CTR: J105.23
C13_L63P_0: J4.56 U3.C13
C15_L33P_1: J4.48 U3.C15
C16_L33N_1: J4.47 U3.C16
CS: J105.1
D11_L66P_0: J4.52 U3.D11
D12_L66N_0: J4.51 U3.D12
D14_L31P_1: J4.36 U3.D14
D16_L31N_1: J4.35 U3.D16
DONE_2: J3.6 R13.1 U3.P13
E1_L46N_3: J3.57 U3.E1
E2_L46P_3: J3.58 U3.E2
E3_L54N_3: J3.53 U3.E3
E4_L54P_3: J3.54 U3.E4
E15_L34P_1: J4.46 U3.E15
E16_L34N_1: J4.45 U3.E16
EN: R209.1 TP6.1(TP)
EN_HVPS: TP9.1(TP)
F1_L41N_GCLK26_3: J3.55 U3.F1
F2_L41P_GCLK27_3: J3.56 U3.F2
F3_L53N_3: J3.51 U3.F3
F4_L53P_3: J3.52 U3.F4
F5_L55N_3: J3.45 U3.F5
F6_L55P_3: J3.46 U3.F6
F10_KEY_0: R21.2 S1.1 U3.F10
F13_L32P_1: J4.32 U3.F13
F14_L32N_1: J4.31 U3.F14
F15_L35P_1: J4.44 U3.F15
F16_L35N_1: J4.43 U3.F16
FPGA_TCK: J2.6 U3.C14
FPGA_TDI: J2.10 U3.C12
FPGA_TDO: J2.8 U3.E14
FPGA_TMS: J2.4 U3.A15
G1_L40N_3: J3.49 U3.G1
G3_L40P_3: J3.50 U3.G3
G5_L51N_3: J3.43 U3.G5
G6_L51P_3: J3.44 U3.G6
G12_L38P_1: J4.22 U3.G12
G14_L36P_1: J4.28 U3.G14
G16_L36N_1: J4.27 U3.G16
H1_L39N_3: J3.47 U3.H1
H2_L39P_3: J3.48 U3.H2
H3_50MHZ_CLK: R7.1 U3.H3
H4_LED_3: R1.2 U3.H4
H11_L38N_1: J4.21 U3.H11
H13_L39P_1: J4.26 U3.H13
H14_L39N_1: J4.25 U3.H14
H15_L37P_1: J4.40 U3.H15
H16_L37N_1: J4.39 U3.H16
HV+: C401.1 C602.1 D201.1(K) R305.1 TP2.1(TP)
J1_L38N_3: J3.37 U3.J1
J3_L38P_3: J3.38 U3.J3
J4_L42N_GCLK24_3: J3.39 U3.J4
J11_L40P_GCLK11_1: J4.18 U3.J11
J12_L40N_GCLK10_1: J4.17 U3.J12
J13_L41P_GCLK9_1: J4.16 U3.J13
J16_RFU_CLK: R10.1 U3.J16
K1_L37N_3: J3.35 U3.K1
K2_L37P_3: J3.36 U3.K2
K3_L42P_GCLK25_3: J3.40 U3.K3
K14_L41N_GCLK8_1: J4.15 U3.K14
K15_L44P_1: J4.38 U3.K15
K16_L44N_1: J4.37 U3.K16
L1_L36N_3: J3.31 U3.L1
L3_L36P_3: J3.32 U3.L3
L4_L45P_3: J3.34 U3.L4
L5_L45N_3: J3.33 U3.L5
L14_L47P_1: J4.14 U3.L14
L16_L47N_1: J4.13 U3.L16
LCD_D0: J105.6
LCD_D1: J105.7
LCD_D2: J105.8
LCD_D3: J105.9
LCD_D4: J105.10
LCD_D5: J105.11
LCD_D6: J105.12
LCD_D7: J105.13
LCD_D8: J105.14
LCD_D9: J105.15
LCD_D10: J105.16
LCD_D11: J105.17
LCD_D12: J105.18
LCD_D13: J105.19
LCD_D14: J105.20
LCD_D15: J105.21
M1_L35N_3: J3.27 U3.M1
M2_L35P_3: J3.28 U3.M2
M5_L2P_3: J3.30 U3.M5
M13_L74P_1: J4.12 U3.M13
M14_L74N_1: J4.11 U3.M14
M15_L46P_1: J4.34 U3.M15
M16_L46N_1: J4.33 U3.M16
MSEL0: R9.1 U3.T11
MSEL1: R16.1 R17.2 U3.N11
N1_L34N_3: J3.25 U3.N1
N3_L34P_3: J3.26 U3.N3
N4_L2N_3: J3.29 U3.N4
N5_L49P_2: J3.18 U3.N5
N12_IO_MISO2_2: R5.1 U1.3(W\P\(IO2)) U3.N12
P1_L33N_3: J3.23 U3.P1
P2_L33P_3: J3.24 U3.P2
P5_L49N_2: J3.17 U3.P5
P6_L47P_2: J3.14 U3.P6
P10_IO_DIN_MISO1_2: J3.7 U1.2 U3.P10
P12_IO_MISO3_2: R4.1 U1.7 U3.P12
P15_L48P_1: J4.30 U3.P15
P16_L48N_1: J4.29 U3.P16
PHOTON_PULSE: U69.9
PROGRAM_B_2: J3.10 R11.1 U3.T2
PULSE: R916.1 R962.1 TP38.1(TP) U69.12 U92.5
PWR_IC: C102.1 C104.1 R206.1 TP5.1(TP) U101.2(V+)
PWR_IN: C103.1 L101.1 TP3.1(TP)
QUENCH_VDWN: U69.1
QUENCH_VOLTAGE_DOWN: R528.1 TP16.1(TP) U69.20
R1_L32N_3: J3.21 U3.R1
R2_L32P_3: J3.22 U3.R2
R3_IO_INIT_B_2: J3.8 R12.1 U3.R3
R5_L48P_2: J3.16 U3.R5
R7_L32P_GCLK29_2: J3.12 U3.R7
R9_L23P_2: J4.4 U3.R9
R11_IO_CCLK_2: J3.5 R6.2 U1.6
R12_L52P_1: J4.6 U3.R12
R14_L50P_1: J4.10 U3.R14
R15_L49P_1: J4.24 U3.R15
R16_L49N_1: J4.23 U3.R16
RD: J105.4
RESET_DIS: U69.3
RESET_DISCHARGE: R842.1 TP25.1(TP) U69.18
RS: J105.2
RST: J105.5
RT_BUSY: J105.32
RT_MISO: J105.29
RXD: U3.M12 U7.9
SDRAM_A0: U3.C11 U4.23
SDRAM_A1: U3.C10 U4.24
SDRAM_A2: U3.F9 U4.25
SDRAM_A3: U3.E11 U4.26
SDRAM_A4: U3.E10 U4.29
SDRAM_A5: U3.C8 U4.30
SDRAM_A6: U3.D9 U4.31
SDRAM_A7: U3.D8 U4.32
SDRAM_A8: U3.E8 U4.33
SDRAM_A9: U3.E7 U4.34
SDRAM_A10: U3.A11 U4.22
SDRAM_A11: U3.F7 U4.35
SDRAM_A12: U3.D6 U4.36
SDRAM_BA0: U3.A10 U4.20
SDRAM_BA1: U3.B10 U4.21
SDRAM_DQ0: U3.B3 U4.2
SDRAM_DQ1: U3.A3 U4.4
SDRAM_DQ2: U3.A4 U4.5
SDRAM_DQ3: U3.B5 U4.7
SDRAM_DQ4: U3.A5 U4.8
SDRAM_DQ5: U3.B6 U4.10
SDRAM_DQ6: U3.A6 U4.11
SDRAM_DQ7: U3.C7 U4.13
SDRAM_DQ8: U3.D5 U4.42
SDRAM_DQ9: U3.C3 U4.44
SDRAM_DQ10: U3.C2 U4.45
SDRAM_DQ11: U3.D1 U4.47
SDRAM_DQ12: U3.B1 U4.48
SDRAM_DQ13: U3.C1 U4.50
SDRAM_DQ14: U3.A2 U4.51
SDRAM_DQ15: U3.B2 U4.53
SDRAM_LDQM: U3.A7 U4.15
SDRAM_NSCAS: U3.A8 U4.17
SDRAM_NSCS: U3.C9 U4.19
SDRAM_NSRAS: U3.A9 U4.18
SDRAM_NWE: U3.B8 U4.16
SDRAM_SCKE: U3.C6 U4.37
SDRAM_SCLK: U3.E6 U4.38
SDRAM_UDQM: U3.C5 U4.39
T3_CSO_B_2: R3.1 U1.1 U3.T3
T5_L48N_2: J3.15 U3.T5
T6_L47N_2: J3.13 U3.T6
T7_L32N_GCLK28_2: J3.11 U3.T7
T8_IO_GCLK0_2: J3.9 U3.T8
T9_L23N_2: J4.3 U3.T9
T10_IO_MOSI_MISO0_2: R8.2 U1.5
T12_L52N_1: J4.5 U3.T12
T13_L51N_1: J4.7 U3.T13
T14_L51P_1: J4.8 U3.T14
T15_L50N_1: J4.9 U3.T15
T_CLK: J105.34
T_CS: J105.33
T_MOSI: J105.30
T_PEN: J105.31
TXD: U3.P8 U7.8
USB_DM: J1.2 U7.2
USB_DP: J1.3 U7.1
VBIAS: R971.2 TP11.1(TP)
VQUENCH: Q89.2(S) R822.1 TP39.1(TP)
VQUENCH_PWR: C715.1 D77.1(K) R733.1 TP35.1(TP)
VREF: C936.1 R910.1 R957.2 R963.2
WR: J105.3
N00177: Q201.1 U101.1
N00181: Q201.3(S) R105.1 U101.8
N00224: D201.2 L101.2 Q201.2
N00671: C205.1 U101.5
N03183: R206.2 R207.2 R209.2 U101.4
N10874: F1.1 J1.1
N20588: R7.2 Y1.3
N92203: R10.2 Y2.3
N141459: D2.1 R2.2
N147837: R14.1 U3.C4
N151004: R8.1 U3.T10
N151270: R6.1 U3.R11
N154888: R15.1 U3.L11
N154918: R18.2 U3.P14
N155350: D1.1 R1.1
N271586: C60.1 U7.10
N273444: R22.1 U7.6
N273448: D3.1 R22.2
N281531: C602.2 R204.1 R305.2 U101.3
N361468: R204.2 R302.1 R303.1
N365385: C737.1 C738.1 C739.1 L74.1 R740.1 R741.2 U75.5(VCC)
N365393: D77.2 L74.2 U75.6
N365573: R736.2 R740.2 U75.4
N365581: R733.2 R735.1 U75.3
N370992: D611.1(CATHODE) Q89.1 R822.2
N371048: D611.2 Q45.3
N371052: D94.2 D812.1(K) R812.2 R911.2
N371122: D812.2 Q89.3 R818.2
N371190: Q45.1 R326.1 R528.2
N371268: C930.2 D92.2(CATHODE) R911.1 R941.2
N371272: Q83.3 R812.1
N371414: Q83.1 R842.2 R843.1
N371666: C930.1 C943.2 R956.1
N372066: R957.1 R960.2 U98.1(REF) U98.3
N375383: R961.1 U92.1
N376175: R962.2 R963.1 U92.3
N378300: R264.2 U69.10
N379806: C944.1 R965.1 R966.2 R967.2
N380805: C943.1 R967.1 U910.3
N381019: R968.2 R969.2 U910.4
N381074: C946.2 R968.1 U910.1
N381200: C945.1 R969.1
N382559: C946.1 R961.2 R970.2
N382943: D94.1(K) R971.1
N383561: R741.1 TP32.1(TP)
N387558: R172.1 R972.1 R973.1
N387570: R172.2 R972.2 R973.2

Pads without a net: J1 4; J2 12 14; U3 D3 E12 E13 F12 G11 H5 J6 J14 K5 K6 K11 K12 L7 L8 L10 L12 L13 M3 M4 M6 M7 M9 M10 M11 N6 N8 N9 N14 N16 P4 P7 P9 P11 T4; U4 40; U7 4 5; U69 4 5 6 7 8 13 14 15 16 17; Y1 1; Y2 1

## Via types
v1: diameter 0.457, hole 0.254, TOP to BOTTOM, 339 vias

## Routing (per net, layer and track width the routed paths; a pad name or vN(x,y) marks a point on that pad's centre or on a via; arc(x,y) is an arc through that point)
+1.2V: length 17.6
  TOP w0.406: U3.K10 v1(70.93,35.96) U3.J9 ; v1(69.93,37.96) U3.K8 ; v1(73.93,35.96) U3.G9 v1(72.93,36.96) U3.H8 v1(72.93,37.96) ; U3.J7 v1(70.93,38.96) ; v1(73.93,38.96) U3.G7 v1(72.93,38.96) ; U3.H10 v1(72.93,35.96)
  BOTTOM w0.406: U3.K8 v1(69.93,37.96) C26.1 ; C24.1 v1(62.41,38.96) ; C28.1 v1(72.93,36.96) ; C39.1 v1(62.41,34.96) ; C22.1 v1(73.93,38.96) ; U3.G9 v1(72.93,35.96) ; C32.1 v1(62.41,36.96) ; C19.1 v1(72.93,38.96) ; C20.1 v1(70.93,38.96) ; U3.J9 v1(70.93,35.96) ; U3.G7 v1(72.93,37.96) ; C30.1 v1(73.93,35.96)
  vias: v1(41.21,34.88) v1(41.21,33.86) v1(41.21,32.84) v1(41.21,31.83)
+2.5V:
  vias: v1(41.21,27.38) v1(41.21,26.37) v1(41.21,25.35) v1(41.21,24.34) v1(58.56,29.81) v1(58.56,29.02)
+3.3V: length 58.8
  TOP w0.254: C2.1 53.37,36.68 53.32,36.63 arc(53.11,36.49) R4.2
  TOP w0.406: U3.F11 v1(74.93,33.96) ; U3.R4 v1(64.93,41.96) ; U4.49 v1(98.56,43.36) ; U3.E5 v1(75.93,40.96) ; U4.3 v1(89.66,45.76) ; v1(76.93,38.91) 76.88,38.91 U3.D7 ; U3.N2 v1(67.93,42.96) ; v1(77.01,34.88) U3.D10 ; U4.27 v1(89.66,26.56) ; U3.J2 71.86,43.88 v1(71.86,43.96) ; U3.D2 v1(76.93,43.96) ; U4.43 v1(98.56,38.56) ; U3.B9 v1(78.93,36.96) ; U4.1 v1(89.66,47.36) ; Y1.4 C1.1 78.8,50.18 v1(79.38,49.61) ; R9.2 v1(60.5,33.61) ; U4.9 v1(89.66,40.96) ; U3.B4 78.93,41.96 v1(78.93,42.01) ; U3.B13 v1(77.93,32.96) ; U3.L9 v1(68.93,35.96) ; U3.L6 v1(68.93,39.96) ; U3.K4 v1(69.93,40.96) ; C2.1 v1(54.13,38.09) U1.8 ; U3.J10 v1(70.93,34.96) ; U3.N10 v1(67.93,34.96) ; U3.G10 v1(72.93,34.96) ; U3.F8 v1(74.93,36.96) ; U3.H6 v1(71.93,39.96) ; U3.N7 v1(66.93,38.96) ; R3.2 v1(53.48,49.37) ; R5.2 v1(50.61,49.37) ; U3.R8 v1(65.93,37.96) ; U4.14 v1(89.66,36.96) ; v1(72.98,41.91) U3.G4
  BOTTOM w0.406: R15.2 v1(70.93,34.96) C38.1 ; R11.2 R12.2 54.51,39.01 arc(54.41,38.51) v1(54.13,38.09) ; R16.2 v1(68.93,35.96) C35.1 ; C31.1 v1(78.93,36.96) ; C54.1 v1(89.66,47.36) ; C9.1 v1(76.93,43.96) ; C37.1 v1(72.93,34.96) ; C12.1 v1(64.93,41.96) ; C53.1 v1(89.66,45.76) ; C51.1 v1(89.66,36.96) ; C50.1 v1(89.66,26.56) ; C8.1 71.93,44.03 v1(71.86,43.96) ; C27.1 v1(74.93,36.96) ; U3.N10 v1(67.93,34.96) ; C21.1 v1(66.93,38.96) ; U3.B13 v1(77.93,32.96) ; C15.1 v1(71.93,39.96) ; C52.1 v1(89.66,40.96) ; R21.1 v1(104.49,22.33) ; C16.1 v1(69.93,40.96) ; R13.2 v1(50.61,49.37) ; C6.1 v1(98.56,38.56) ; U3.G4 v1(72.98,41.91) ; U3.L6 v1(68.93,39.96) ; C14.1 J2.2 ; C7.1 v1(98.56,43.36)
  vias: v1(41.21,42.37) v1(41.21,41.35) v1(41.21,40.34) v1(41.21,39.32) v1(58.56,28.23) v1(58.56,27.44) v1(61.94,43.96) v1(61.94,41.96) v1(65.94,46.96) v1(67.94,46.96) v1(75.94,46.96) v1(77.94,46.96) v1(81.94,43.96) v1(81.94,41.96) v1(81.94,31.96) v1(81.94,29.96)
+5V: length 16.1
  TOP w0.254: U7.7 v1(51.65,28.65)
  TOP w0.406: R2.1 v1(49.46,50.01) ; C59.1 v1(51.65,28.65)
  BOTTOM w0.508: v1(39.18,29.75) 39.18,29.08 arc(39.33,28.72) 39.69,28.58 44.85,28.58 arc(45.16,28.51) 45.43,28.33 45.66,28.11 arc(45.87,27.96) 46.12,27.91 50.41,27.91 arc(50.85,28) 51.23,28.24 arc(51.24,28.25) 51.26,28.26 v1(51.65,28.65)
  vias: v1(36.13,37.24) v1(36.13,29.75) v1(36.13,22.25) v1(37.15,37.24) v1(37.15,29.75) v1(37.15,22.25) v1(38.16,37.24) v1(38.16,29.75) v1(38.16,22.25) v1(39.18,37.24) v1(39.18,22.25) v1(45.1,49.96) v1(46.12,49.96) v1(46.55,51.95) v1(46.55,50.93)
GND: length 139.3
  TOP w0.254: U7.3 v1(52.15,33.1)
  TOP w0.406: U3.J5 v1(70.93,40.96) ; U3.M8 v1(67.93,36.96) ; U3.E9 v1(75.93,36.96) ; D3.2 v1(49.33,28.81) ; C60.2 v1(52.5,27.01) ; v1(36.34,53.98) J1.S3 v1(34.03,53.98) ; U3.B7 v1(77.93,37.96) ; U3.H9 v1(71.93,35.96) ; v1(76.93,42.01) 76.93,41.96 U3.D4 ; U3.T1 v1(63.93,43.96) ; v1(34.03,44.98) J1.S4 v1(36.34,44.98) ; U4.28 v1(101.56,26.56) ; v1(39.53,44.98) J1.S2 v1(41.84,44.98) ; U4.46 v1(101.56,40.96) ; v1(72.97,21.69) 72.9,21.76 C3.2 ; U3.H12 v1(71.93,33.96) ; U4.54 v1(98.56,47.36) ; U3.J8 v1(70.93,37.96) ; U3.J8 v1(71.93,37.96) ; U3.J8 v1(71.93,36.96) ; U3.J8 v1(70.93,36.96) ; U3.D13 v1(76.93,31.96) ; U3.R6 v1(65.93,38.96) ; U3.L15 v1(68.93,29.96) ; v1(42.29,47.88) J1.5 v1(39.67,47.88) ; U3.K7 v1(69.93,38.96) ; U3.G2 v1(72.98,43.01) ; U3.P3 v1(65.93,42.96) ; C59.2 v1(51.65,26.36) ; U4.41 v1(101.56,36.96) ; D2.2 v1(48.16,50.17) ; v1(73.93,37.96) U3.G8 v1(73.93,36.96) ; C1.2 78,49.18 v1(77.94,49.12) ; v1(38.88,35.23) U5.1 v1(35.62,35.23) ; U3.L2 v1(68.93,43.96) ; U3.T16 v1(63.93,29.96) ; U3.N13 v1(66.93,31.96) ; Y1.2 v1(73.52,51.78) ; U4.52 v1(98.56,45.76) ; U3.H7 v1(71.93,38.96) ; U3.R10 v1(64.93,34.96) ; U4.12 v1(89.66,38.56) ; U4.6 v1(89.66,43.36) ; J1.S1 v1(39.53,53.98) ; v1(78.01,34.88) U3.B11 ; v1(35.62,42.73) U2.1 v1(38.88,42.73) ; U3.K9 v1(69.93,35.96) ; U3.A1 v1(79.93,44.96) ; C2.2 v1(54.13,35.79) ; v1(38.88,27.74) U6.1 v1(37.25,26.85) ; D1.2 v1(107.99,52.94) ; S1.2 v1(108.53,22.33) ; U1.4 v1(50.32,45.76) ; U3.A16 v1(79.93,28.96) ; U3.G15 v1(73.93,29.96)
  TOP w0.508: J3.42 J3.41 85.9,60.07 ; J3.20 J3.19 57.96,60.07 ; J3.3 37.64,60.07 ; J3.4 37.64,54.25 ; 57.96,13.84 J4.20 J4.19
  BOTTOM w0.406: C48.2 67.38,31.51 v1(66.93,31.96) R18.1 ; v1(83.96,31.96) C44.2 v1(83.96,29.96) ; R14.2 v1(83.96,41.96) C10.2 v1(83.96,43.96) ; U3.R6 v1(65.93,38.96) ; C17.2 v1(41.21,38.33) ; C14.2 v1(105.06,24.7) ; U3.H7 v1(71.93,37.96) ; v1(65.94,24.79) C56.2 v1(67.94,24.79) ; v1(75.94,49.12) C4.2 v1(77.94,49.12) ; v1(77.94,24.79) C55.2 v1(75.94,24.79) ; C40.2 v1(76.93,31.96) C45.2 ; C46.2 v1(73.93,29.96) ; U3.L15 v1(68.93,29.96) ; v1(65.93,42.96) U3.P3 ; C24.2 v1(58.83,38.96) ; C28.2 v1(71.93,36.96) ; v1(41.21,30.84) C42.2 ; C19.2 v1(71.93,38.96) ; C32.2 v1(58.83,36.96) ; v1(65.94,49.12) C5.2 v1(67.94,49.12) ; C58.2 v1(39.43,24.34) ; C13.2 73.43,42.56 v1(72.98,43.01) ; C38.2 v1(71.93,35.96) U3.H9 ; C39.2 v1(58.83,34.96) ; C54.2 v1(91.98,47.36) ; C35.2 v1(69.93,35.96) ; v1(69.93,35.96) R17.1 ; v1(69.93,35.96) U3.K9 ; C8.2 v1(71.93,46.3) ; C9.2 v1(76.93,42.01) ; C16.2 v1(70.93,40.96) U3.J5 ; C27.2 v1(75.93,36.96) ; C51.2 v1(91.98,36.96) ; C53.2 v1(91.98,45.76) ; C11.2 v1(58.83,42.96) ; C36.2 v1(67.93,36.96) ; C20.2 v1(69.93,38.96) C23.2 ; C50.2 v1(91.98,26.56) ; v1(39.43,31.83) C43.2 ; C6.2 v1(96.24,38.56) ; C7.2 v1(96.24,43.36) ; v1(71.93,33.96) C37.2 ; C26.2 v1(70.93,37.96) ; U3.J8 v1(70.93,36.96) ; C22.2 v1(73.93,37.96) ; C52.2 v1(91.98,40.96) ; C31.2 v1(81.28,36.96) ; C30.2 v1(73.93,36.96) ; v1(39.43,39.32) C18.2 ; C57.2 v1(41.21,23.35) ; C49.2 v1(58.83,30.96) ; C41.2 v1(63.93,29.96)
  BOTTOM w0.508: J3.20 J3.19 57.96,60.02 ; 85.9,60.02 J3.41 J3.42 ; 37.64,54.33 J3.4 J3.3 37.64,60.02 ; J4.20 57.96,13.82
  vias: v1(38.1,20.47) v1(41.43,60.02) v1(43.94,13.92) v1(46.38,44.75) v1(46.58,59.99) v1(48.16,42.37) v1(48.36,33.22) v1(48.36,30.58) v1(48.31,26.9) v1(48.34,23.32) v1(51.56,13.89) v1(51.59,59.94) v1(56.64,59.97) v1(59.31,13.94) v1(66.83,59.92) v1(66.85,13.89) v1(72.9,25.22) v1(75.74,13.79) v1(79.43,59.99) v1(84.61,60.05) v1(102.64,29.01) v1(102.67,24.38) v1(102.84,33.58) v1(102.9,39.04) v1(103.05,45.24) v1(104.9,60.05) v1(106.45,26.34) v1(106.55,20.52)
VCCIO: length 9.4
  TOP w0.406: v1(71.3,23.02) C3.1 ; U3.R13 v1(64.93,31.96) ; U3.N15 v1(66.93,29.96) ; U3.K13 v1(69.93,31.96) ; U3.D15 v1(76.93,29.96) ; U3.G13 v1(73.93,31.96) ; U3.J15 v1(70.93,29.96)
  BOTTOM w0.406: C46.1 v1(73.93,31.96) ; C48.1 67.38,30.41 v1(66.93,29.96) ; v1(64.93,31.96) 64.64,31.67 C41.1 ; C47.1 v1(69.93,31.96) ; C45.1 v1(76.93,29.96)
  vias: v1(61.94,30.96) v1(61.94,29.96) v1(61.94,28.96) v1(65.94,26.96) v1(67.94,26.96) v1(75.94,26.96) v1(77.94,26.96)
VDD5X: length 4.9
  TOP w0.147: U910.5 U910.6 91.63,81.46 C942.1 C941.1
A12_L62N_0: length 37.9
  TOP w0.127: J4.57 106.22,16.93 arc(106.19,16.84) 106.1,16.8 105.75,16.8 arc(105.28,17) 105.08,17.47 105.08,18.17 105.08,18.17 arc(105.08,18.19) 105.07,18.21 arc(104.95,18.51) 104.76,18.76 104.4,19.12 arc(104.35,19.25) 104.4,19.38 104.41,19.39 arc(104.56,19.76) 104.41,20.13 arc(104.04,20.28) 103.67,20.13 103.67,20.12 arc(103.53,20.07) 103.4,20.12 99.15,24.37 arc(97.81,25.26) 96.23,25.58 90.95,25.58 arc(90.82,25.63) 90.76,25.77 90.76,25.92 arc(90.57,26.11) 90.38,25.92 90.38,25.77 arc(90.33,25.63) 90.19,25.58 88.99,25.58 arc(87.5,25.87) 86.23,26.72 86.05,26.9 arc(86,27.03) 86.05,27.17 arc(86.11,27.3) 86.05,27.43 86.05,27.44 arc(85.92,27.49) 85.78,27.44 85.78,27.44 arc(85.65,27.38) 85.52,27.44 83.79,29.16 arc(83.08,30.23) 82.83,31.49 82.83,31.75 arc(82.75,32.13) 82.53,32.46 82.23,32.76 arc(81.67,33.14) 81,33.27 79.87,33.27 arc(79.64,33.32) U3.A12
A13_L63N_0: length 37.9
  TOP w0.127: U3.A13 79.48,32.41 arc(79.62,32.32) 79.78,32.28 80.86,32.28 arc(81.32,32.09) 81.51,31.64 81.51,29.77 arc(81.54,29.6) 81.64,29.46 82.11,28.98 arc(82.25,28.93) 82.38,28.98 82.47,29.07 arc(82.74,29.07) 82.74,28.8 82.65,28.72 arc(82.65,28.45) 82.92,28.45 83.01,28.53 arc(83.28,28.53) 83.28,28.26 83.19,28.18 arc(83.19,27.91) 83.46,27.91 83.55,27.99 arc(83.82,27.99) 83.82,27.72 83.73,27.64 arc(83.68,27.5) 83.73,27.37 86.01,25.09 arc(86.54,24.74) 87.16,24.61 96.43,24.61 arc(97.65,24.37) 98.68,23.68 100.2,22.16 arc(100.69,21.43) 100.86,20.56 100.86,19.69 arc(100.97,19.42) 101.24,19.3 arc(101.33,19.34) 101.37,19.43 arc(101.51,19.75) 101.83,19.89 arc(102.44,19.64) 102.69,19.03 102.69,16.93 arc(102.73,16.84) 102.82,16.8 103.56,16.8 arc(103.65,16.84) 103.68,16.93 J4.55
A14_L65N_0: length 37.9
  TOP w0.127: U3.A14 79.51,31.38 arc(79.63,31.3) 79.78,31.27 80.24,31.27 arc(80.56,31.13) 80.7,30.81 80.7,28.58 arc(80.74,28.37) 80.85,28.2 81.23,27.82 arc(81.37,27.76) 81.5,27.82 81.55,27.86 arc(81.82,27.86) 81.82,27.59 81.77,27.55 arc(81.77,27.28) 82.04,27.28 82.09,27.32 arc(82.36,27.32) 82.35,27.05 82.31,27.01 arc(82.26,26.88) 82.31,26.74 82.88,26.17 arc(83.01,26.12) 83.15,26.17 83.19,26.21 arc(83.55,26.37) 83.92,26.21 arc(84.07,25.84) 83.92,25.48 83.88,25.44 arc(83.88,25.17) 84.15,25.17 84.19,25.21 arc(84.56,25.36) 84.93,25.21 arc(85.08,24.84) 84.93,24.47 84.89,24.43 arc(84.84,24.3) 84.89,24.16 85.26,23.79 arc(85.48,23.65) 85.73,23.6 97.23,23.6 arc(97.51,23.54) 97.75,23.38 99.7,21.43 arc(99.94,21.07) 100.03,20.65 100.03,20.4 arc(99.87,20.03) 99.5,19.88 98.74,19.88 arc(98.55,19.69) 98.74,19.49 99.5,19.49 arc(99.87,19.34) 100.03,18.97 100.03,16.93 arc(100.06,16.84) 100.15,16.8 101.02,16.8 arc(101.11,16.84) 101.14,16.93 J4.53
B12_L62P_0: length 37.8
  TOP w0.127: J4.58 106.22,16.34 arc(106.19,16.43) 106.1,16.47 105.75,16.47 arc(105.04,16.76) 104.75,17.47 104.75,18.13 arc(104.66,18.34) 104.52,18.53 104.17,18.88 arc(104.02,19.25) 104.17,19.62 104.18,19.62 arc(104.23,19.76) 104.18,19.89 104.17,19.9 arc(104.04,19.95) 103.91,19.89 103.9,19.89 arc(103.53,19.74) 103.16,19.89 98.92,24.13 arc(97.69,24.96) 96.23,25.25 88.99,25.25 arc(87.37,25.57) 86,26.49 83.56,28.93 arc(82.77,30.1) 82.5,31.49 82.5,31.75 arc(82.45,32.01) 82.3,32.23 82,32.53 arc(81.54,32.84) 81,32.94 79.67,32.94 arc(79,33.08) U3.B12
B14_L65P_0: length 37.9
  TOP w0.127: J4.54 101.14,16.34 arc(101.11,16.43) 101.02,16.47 100.15,16.47 arc(99.83,16.61) 99.69,16.93 99.69,18.97 arc(99.64,19.11) 99.5,19.16 98.74,19.16 arc(98.22,19.69) 98.74,20.21 99.5,20.21 arc(99.64,20.26) 99.69,20.4 99.69,20.65 arc(99.64,20.95) 99.47,21.2 97.52,23.15 arc(97.39,23.24) 97.23,23.27 85.73,23.27 arc(85.35,23.34) 85.03,23.56 84.66,23.93 arc(84.5,24.3) 84.66,24.66 84.69,24.7 arc(84.75,24.83) 84.7,24.97 84.69,24.97 arc(84.56,25.03) 84.43,24.97 84.39,24.93 arc(83.65,24.93) 83.65,25.67 83.69,25.71 arc(83.74,25.84) 83.69,25.97 83.69,25.98 arc(83.55,26.03) 83.42,25.98 83.38,25.94 arc(83.01,25.79) 82.64,25.94 80.62,27.97 arc(80.43,28.25) 80.37,28.58 80.37,30.81 arc(80.33,30.9) 80.24,30.94 79.69,30.94 arc(79.01,31.07) U3.B14
B15_L29P_1: length 37.9
  TOP w0.127: J4.50 96.06,16.34 arc(96.1,16.43) 96.19,16.47 97.16,16.47 arc(97.48,16.61) 97.61,16.93 97.61,19.02 arc(97.46,19.39) 97.09,19.55 96.71,19.55 arc(96.52,19.74) 96.71,19.93 97.09,19.93 arc(97.61,20.45) 97.09,20.97 96.56,20.97 arc(96.37,21.16) 96.56,21.35 97.09,21.35 arc(97.46,21.5) 97.61,21.87 97.61,22.12 arc(97.46,22.5) 97.08,22.66 85.11,22.66 arc(84.84,22.71) 84.61,22.86 83.12,24.36 arc(82.75,24.51) 82.38,24.36 81.63,23.61 arc(81.36,23.61) 81.36,23.88 82.11,24.63 arc(82.26,25) 82.11,25.37 80.54,26.94 79.1,28.38 arc(78.98,28.55) 78.94,28.76 78.94,29.23 arc(78.81,29.89) U3.B15
B16_L29N_1: length 37.9
  TOP w0.127: U3.B16 78.46,29.43 arc(78.57,29.26) 78.61,29.06 78.61,28.76 arc(78.68,28.42) 78.87,28.14 79.23,27.78 arc(79.28,27.65) 79.23,27.51 79.22,27.5 arc(79.22,27.23) 79.49,27.23 79.5,27.24 arc(79.77,27.24) 79.77,26.97 79.76,26.96 arc(79.76,26.69) 80.03,26.69 80.04,26.7 arc(80.17,26.76) 80.31,26.7 81.88,25.13 arc(81.93,25) 81.88,24.86 81.12,24.11 arc(81.12,23.37) 81.86,23.37 82.61,24.13 arc(82.75,24.18) 82.88,24.13 84.38,22.63 arc(84.72,22.41) 85.11,22.33 97.08,22.33 arc(97.22,22.27) 97.28,22.12 97.28,21.87 arc(97.23,21.73) 97.09,21.68 96.56,21.68 arc(96.04,21.16) 96.56,20.64 97.09,20.64 arc(97.28,20.45) 97.09,20.26 96.71,20.26 arc(96.19,19.74) 96.71,19.22 97.09,19.22 arc(97.23,19.16) 97.28,19.02 97.28,18.75 arc(97.24,18.65) 97.14,18.61 arc(97.01,18.55) 96.95,18.42 arc(97.01,18.28) 97.14,18.22 arc(97.24,18.18) 97.28,18.08 97.28,17.98 arc(97.24,17.88) 97.14,17.84 arc(97.04,17.8) 97,17.7 97,17.6 arc(97.04,17.5) 97.14,17.46 arc(97.24,17.42) 97.28,17.32 97.28,16.93 arc(97.24,16.84) 97.16,16.8 96.19,16.8 arc(96.1,16.84) 96.06,16.93 J4.49
C13_L63P_0: length 37.9
  TOP w0.127: J4.56 103.68,16.34 arc(103.65,16.43) 103.56,16.47 102.82,16.47 arc(102.5,16.61) 102.36,16.93 102.36,19.03 arc(102.21,19.4) 101.83,19.56 arc(101.74,19.52) 101.7,19.43 arc(101.57,19.11) 101.24,18.97 arc(100.74,19.18) 100.53,19.69 100.53,20.56 100.53,20.56 arc(100.39,21.3) 99.97,21.93 98.45,23.45 arc(97.52,24.06) 96.43,24.28 87.16,24.28 arc(86.41,24.43) 85.78,24.85 83.5,27.13 81.4,29.23 arc(81.24,29.48) 81.18,29.77 81.18,31.64 arc(81.09,31.86) 80.86,31.95 78.65,31.95 arc(77.99,32.08) U3.C13
C15_L33P_1: length 37.8
  TOP w0.127: J4.48 93.52,16.34 arc(93.56,16.43) 93.65,16.47 94.62,16.47 arc(94.94,16.61) 95.07,16.93 95.07,19.58 arc(94.92,19.95) 94.55,20.1 93.46,20.1 arc(93.27,20.29) 93.46,20.49 94.55,20.49 arc(94.92,20.64) 95.07,21.01 95.07,21.26 arc(94.94,21.58) 94.62,21.72 83.9,21.72 arc(83.76,21.77) 83.71,21.91 83.71,22.26 arc(83.19,22.78) 82.66,22.26 82.66,21.91 arc(82.47,21.72) 82.28,21.91 82.28,22.26 arc(81.76,22.78) 81.24,22.26 81.24,21.91 arc(81.19,21.77) 81.05,21.72 80.8,21.72 arc(80.64,21.78) 80.57,21.95 80.57,25.23 arc(80.53,25.42) 80.42,25.58 78.06,27.95 arc(77.96,28.09) 77.93,28.26 77.93,29.26 arc(77.8,29.91) U3.C15
C16_L33N_1: length 37.8
  TOP w0.127: J4.47 93.52,16.93 arc(93.56,16.84) 93.65,16.8 94.62,16.8 arc(94.7,16.84) 94.74,16.93 94.74,18.5 arc(94.69,18.64) 94.55,18.69 94.42,18.69 arc(94.23,18.88) 94.42,19.08 94.55,19.08 arc(94.69,19.13) 94.74,19.27 94.74,19.58 arc(94.69,19.72) 94.55,19.77 93.46,19.77 arc(92.94,20.29) 93.46,20.82 94.55,20.82 arc(94.69,20.87) 94.74,21.01 94.74,21.26 arc(94.7,21.35) 94.62,21.39 83.9,21.39 arc(83.53,21.54) 83.38,21.91 83.38,22.26 arc(83.19,22.45) 82.99,22.26 82.99,21.91 arc(82.47,21.39) 81.95,21.91 81.95,22.26 arc(81.76,22.45) 81.57,22.26 81.57,21.91 arc(81.42,21.54) 81.05,21.39 80.8,21.39 arc(80.4,21.55) 80.24,21.95 80.24,25.23 arc(80.23,25.29) 80.19,25.35 79.22,26.31 arc(79.09,26.37) 78.95,26.31 78.78,26.14 arc(78.51,26.14) 78.51,26.41 78.68,26.58 arc(78.74,26.72) 78.68,26.85 77.83,27.71 arc(77.66,27.96) 77.6,28.26 77.6,29.08 arc(77.56,29.28) 77.45,29.44 U3.C16
D11_L66P_0: length 37.9
  TOP w0.147: U3.D11 v1(76.93,33.96)
  BOTTOM w0.127: J4.52 98.6,16.34 arc(98.64,16.43) 98.73,16.47 99.39,16.47 arc(99.84,16.66) 100.03,17.11 100.03,20.61 arc(99.88,20.96) 99.52,21.11 90.28,21.11 arc(89.94,21.17) 89.66,21.36 84.03,27 arc(83.97,27.13) 84.03,27.27 84.31,27.55 arc(84.46,27.92) 84.31,28.29 arc(83.94,28.44) 83.57,28.29 83.29,28 arc(83.15,27.95) 83.02,28 81.11,29.92 arc(80.9,30.23) 80.82,30.6 80.82,30.77 arc(80.7,31.38) 80.36,31.89 78.72,33.53 arc(78.47,33.7) 78.18,33.76 77.42,33.76 arc(77.15,33.81) v1(76.93,33.96)
D12_L66N_0: length 37.9
  TOP w0.147: U3.D12 v1(75.93,33.96)
  BOTTOM w0.127: J4.51 98.6,16.93 arc(98.64,16.84) 98.73,16.8 99.39,16.8 arc(99.61,16.89) 99.69,17.11 99.69,20.61 arc(99.65,20.73) 99.52,20.78 90.28,20.78 arc(89.82,20.87) 89.43,21.13 83.79,26.76 arc(83.64,27.13) 83.79,27.5 84.08,27.78 arc(84.13,27.92) 84.08,28.05 arc(83.94,28.11) 83.81,28.05 83.52,27.77 arc(83.15,27.62) 82.79,27.77 80.87,29.68 arc(80.59,30.1) 80.49,30.6 80.49,30.77 arc(80.4,31.25) 80.12,31.66 78.49,33.3 arc(78.35,33.39) 78.18,33.43 77.21,33.43 arc(76.52,33.56) v1(75.93,33.96)
D14_L31P_1: length 37.9
  TOP w0.147: U3.D14 v1(76.93,30.96)
  BOTTOM w0.127: v1(76.93,30.96) 76.7,30.72 arc(76.56,30.52) 76.51,30.28 76.51,29.82 arc(76.62,29.57) 76.87,29.46 78.54,29.46 arc(78.9,29.32) 79.04,28.96 79.04,28.5 arc(79.05,28.45) 79.08,28.41 81.27,26.22 arc(81.37,26.07) 81.41,25.9 81.41,25.29 arc(81.27,24.97) 80.95,24.84 80.2,24.84 arc(80.01,24.65) 80.2,24.45 81.63,24.45 arc(82.15,23.93) 81.63,23.41 80.2,23.41 arc(80.01,23.22) 80.2,23.03 81.8,23.03 arc(82.32,22.51) 81.8,21.99 80.2,21.99 arc(80.01,21.8) 80.2,21.61 81.8,21.61 arc(82.32,21.09) 81.8,20.57 80.2,20.57 arc(80.01,20.38) 80.2,20.19 81.93,20.19 arc(82.45,19.67) 81.93,19.15 79.9,19.15 arc(79.76,19.09) 79.71,18.96 79.71,17.4 arc(79.43,16.74) 78.78,16.47 78.41,16.47 arc(78.32,16.43) 78.28,16.34 J4.36
D16_L31N_1: length 37.9
  TOP w0.147: U3.D16 v1(76.93,28.96)
  BOTTOM w0.127: v1(76.93,28.96) 77,29.02 arc(77.05,29.06) 77.1,29.09 arc(77.1,29.1) 77.11,29.1 arc(77.18,29.12) 77.27,29.13 77.52,29.13 arc(77.66,29.08) 77.71,28.94 77.71,28.46 arc(77.9,28.27) 78.09,28.46 78.09,28.94 arc(78.15,29.08) 78.28,29.13 78.54,29.13 arc(78.66,29.08) 78.71,28.96 78.71,28.5 arc(78.75,28.33) 78.85,28.18 80.31,26.72 arc(80.36,26.58) 80.31,26.45 79.92,26.06 arc(79.92,25.79) 80.19,25.79 80.58,26.18 arc(80.71,26.23) 80.85,26.18 81.04,25.99 arc(81.07,25.94) 81.08,25.9 81.08,25.29 arc(81.04,25.2) 80.95,25.17 80.2,25.17 arc(79.68,24.65) 80.2,24.12 81.63,24.12 arc(81.82,23.93) 81.63,23.74 80.2,23.74 arc(79.68,23.22) 80.2,22.7 81.8,22.7 arc(81.99,22.51) 81.8,22.32 80.2,22.32 arc(79.68,21.8) 80.2,21.28 81.8,21.28 arc(81.99,21.09) 81.8,20.9 80.2,20.9 arc(79.68,20.38) 80.2,19.86 81.93,19.86 arc(82.12,19.67) 81.93,19.48 79.9,19.48 arc(79.53,19.32) 79.38,18.96 79.38,17.4 arc(79.2,16.98) 78.78,16.8 78.41,16.8 arc(78.32,16.84) 78.28,16.93 J4.35
DONE_2: length 50.5
  TOP w0.147: U3.P13 v1(65.93,32.96)
  BOTTOM w0.147: v1(65.93,32.96) 63.79,32.96 arc(63.62,32.92) 63.47,32.82 63.13,32.48 arc(62.96,32.37) 62.77,32.33 51.26,32.33 arc(50.81,32.42) 50.43,32.68 48.31,34.8 arc(48.16,35.02) 48.11,35.28 48.11,39.81 arc(48.16,40.09) 48.32,40.32 50.69,42.68 arc(50.92,43.04) 51,43.45 51,45.75 arc(51.05,45.98) 51.18,46.18 51.44,46.43 arc(51.57,46.63) 51.61,46.86 R13.1 51.61,49.2 arc(51.57,49.43) 51.44,49.63 48.93,52.13 arc(48.53,52.41) 48.04,52.5 42.3,52.5 arc(42.03,52.55) 41.81,52.7 40.42,54.09 arc(40.25,54.36) 40.18,54.67 J3.6
E1_L46N_3: length 37.2
  TOP w0.127: J3.57 106.22,57.57 arc(106.19,57.48) 106.1,57.44 105.99,57.44 arc(105.6,57.36) 105.27,57.14 105.1,56.98 arc(104.88,56.65) 104.8,56.25 104.8,56.14 arc(104.73,55.79) 104.53,55.5 103.31,54.27 arc(102.95,54.03) 102.54,53.95 102.18,53.95 arc(101.33,53.78) 100.61,53.3 99.27,51.96 arc(96.61,50.18) 93.47,49.56 88.55,49.56 arc(88.42,49.61) 88.36,49.75 88.36,49.77 arc(88.17,49.96) 87.98,49.77 87.98,49.75 arc(87.93,49.61) 87.79,49.56 86.9,49.56 arc(84.4,49.06) 82.28,47.64 81.75,47.12 arc(80.23,46.1) 78.44,45.75 77.02,45.75 arc(76.47,45.64) 76.01,45.33 75.64,44.96 arc(75.49,44.73) U3.E1
E2_L46P_3: length 37.3
  TOP w0.127: J3.58 106.22,56.98 arc(106.19,57.07) 106.1,57.11 105.99,57.11 arc(105.72,57.06) 105.5,56.91 105.33,56.74 arc(105.18,56.52) 105.13,56.25 105.13,56.14 arc(105.04,55.66) 104.77,55.26 103.54,54.04 arc(103.08,53.73) 102.54,53.62 102.18,53.62 arc(101.46,53.47) 100.84,53.06 99.5,51.73 arc(96.73,49.88) 93.47,49.23 86.9,49.23 arc(84.52,48.75) 82.51,47.41 81.99,46.88 arc(80.36,45.8) 78.44,45.42 77.02,45.42 arc(76.6,45.33) 76.24,45.09 76.1,44.95 76.07,44.91 arc(75.98,44.77) 75.95,44.6 75.95,44.22 arc(75.9,43.99) 75.77,43.79 U3.E2
E3_L54N_3: length 37.2
  TOP w0.147: U3.E3 v1(75.93,42.96)
  BOTTOM w0.127: J3.53 101.14,57.57 arc(101.11,57.48) 101.02,57.44 100.23,57.44 arc(99.85,57.29) 99.69,56.91 99.69,53.32 arc(99.63,53) 99.44,52.72 95.52,48.79 arc(95.13,48.53) 94.66,48.44 80.68,48.44 arc(80.31,48.36) 80,48.15 78.25,46.41 arc(78.08,46.29) 77.88,46.25 76.75,46.25 arc(76.27,46.06) 76.07,45.58 76.07,44.25 arc(76.04,44.16) 75.95,44.12 75.88,44.12 arc(75.69,43.93) 75.88,43.74 75.95,43.74 arc(76.04,43.7) 76.07,43.61 76.07,43.15 arc(76.06,43.1) 76.04,43.06 v1(75.93,42.96)
